# Altium PCB Tigershark 3D R1.8.PcbDoc (part 1 of 4)
Units mil, origin at the board's own origin, x right, y up, seen from the top; angles counter-clockwise.
Board outline 5500 x 4600 mil, 4 copper layers (Top Layer, Groun Plane, Power Plane, Bottom Layer), stack 61.73 mil thick; 307 components, 237 nets, 994 pads, 1215 vias.
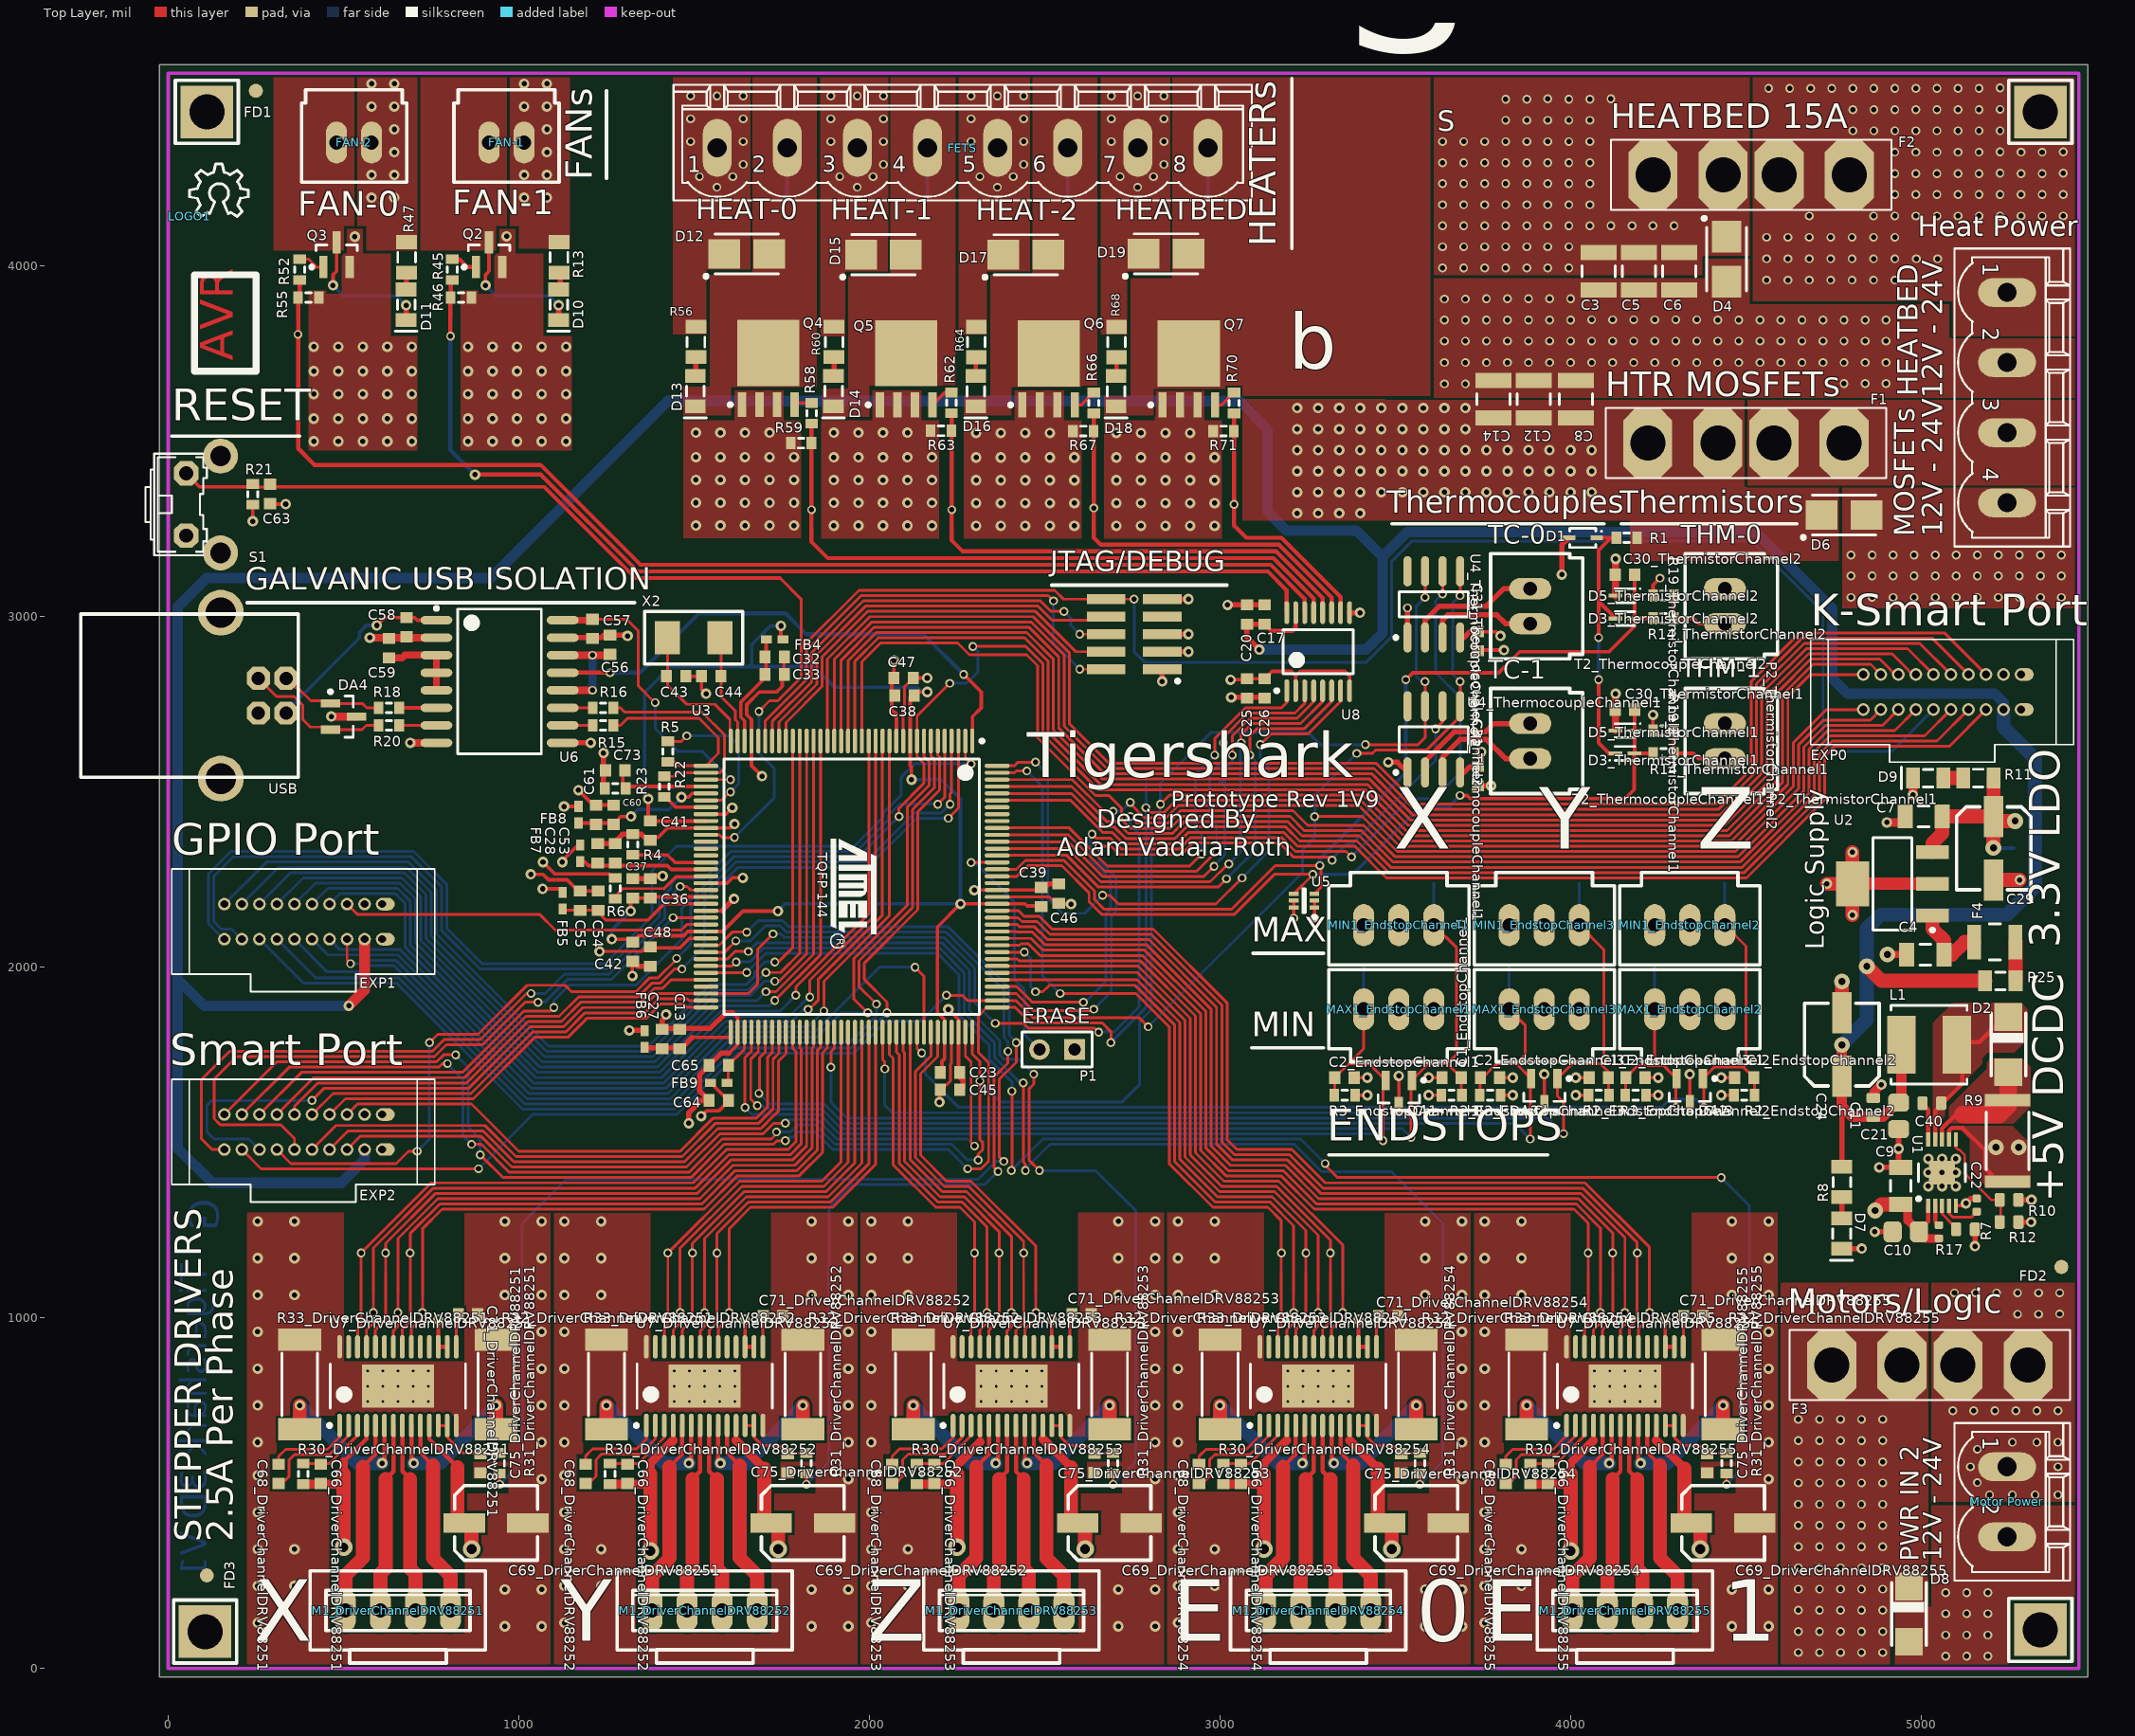
[diagram p0: Top Layer view]
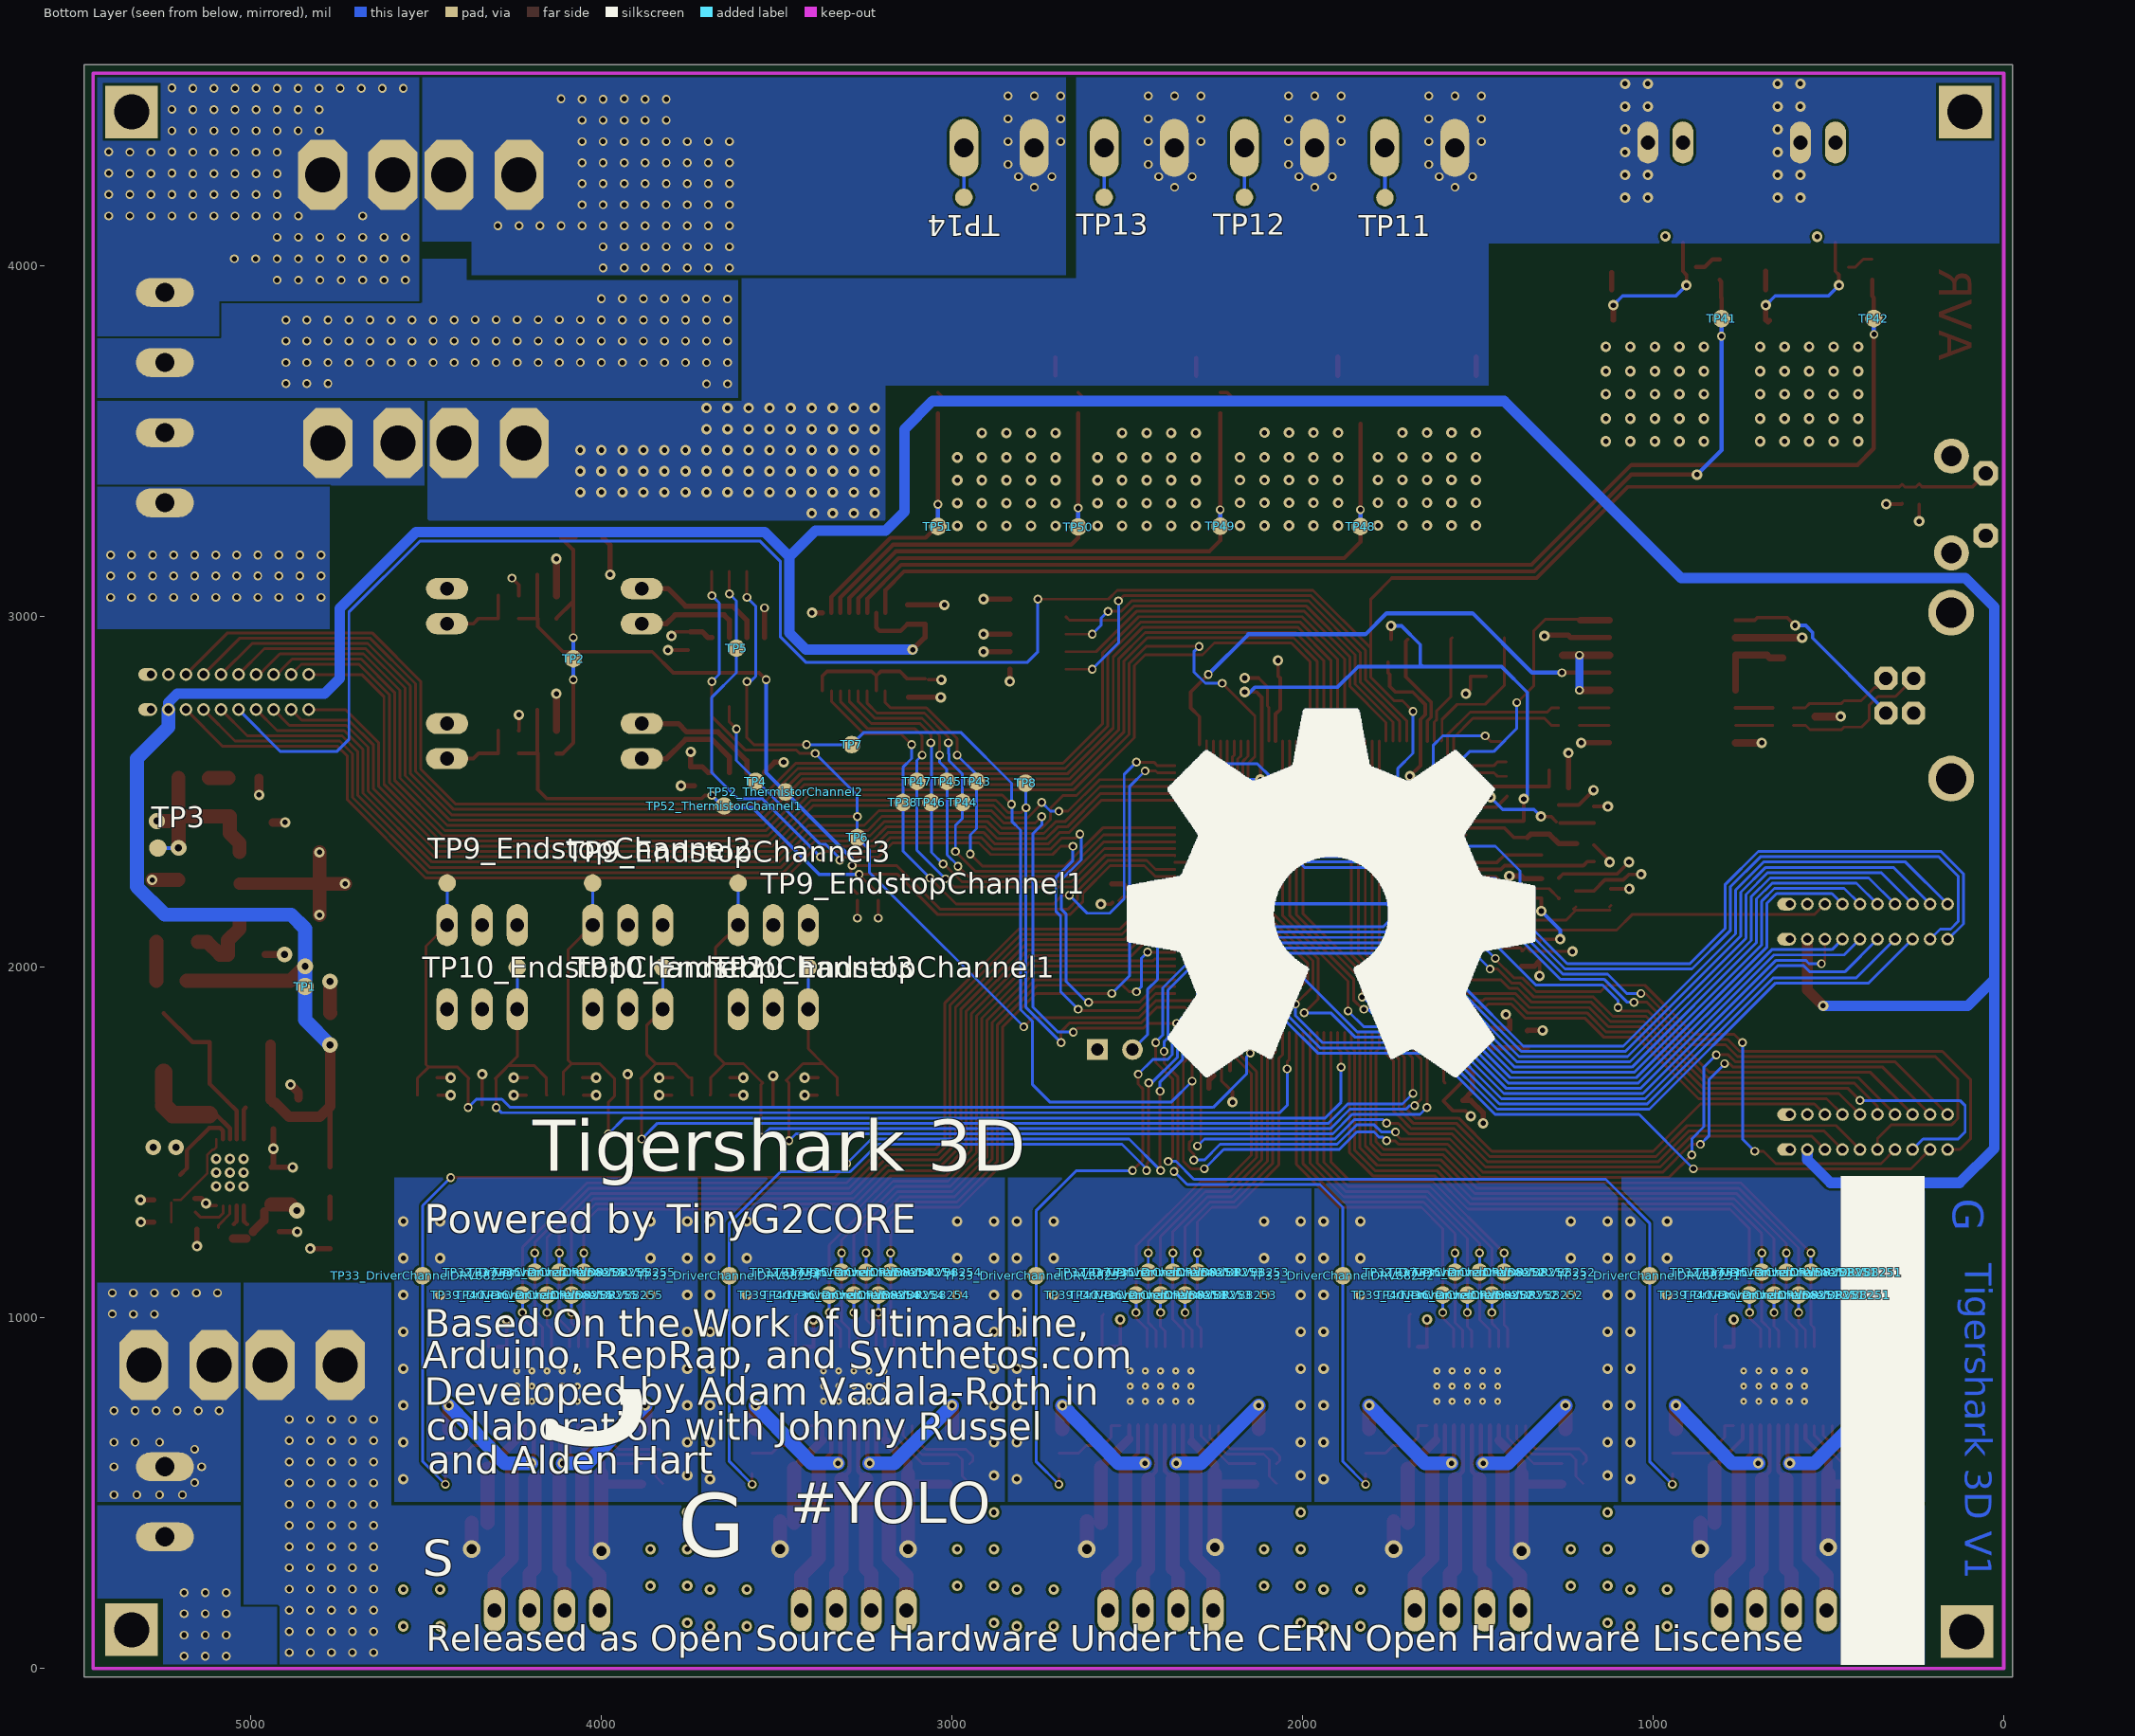
[diagram p1: Bottom Layer view, seen from below]
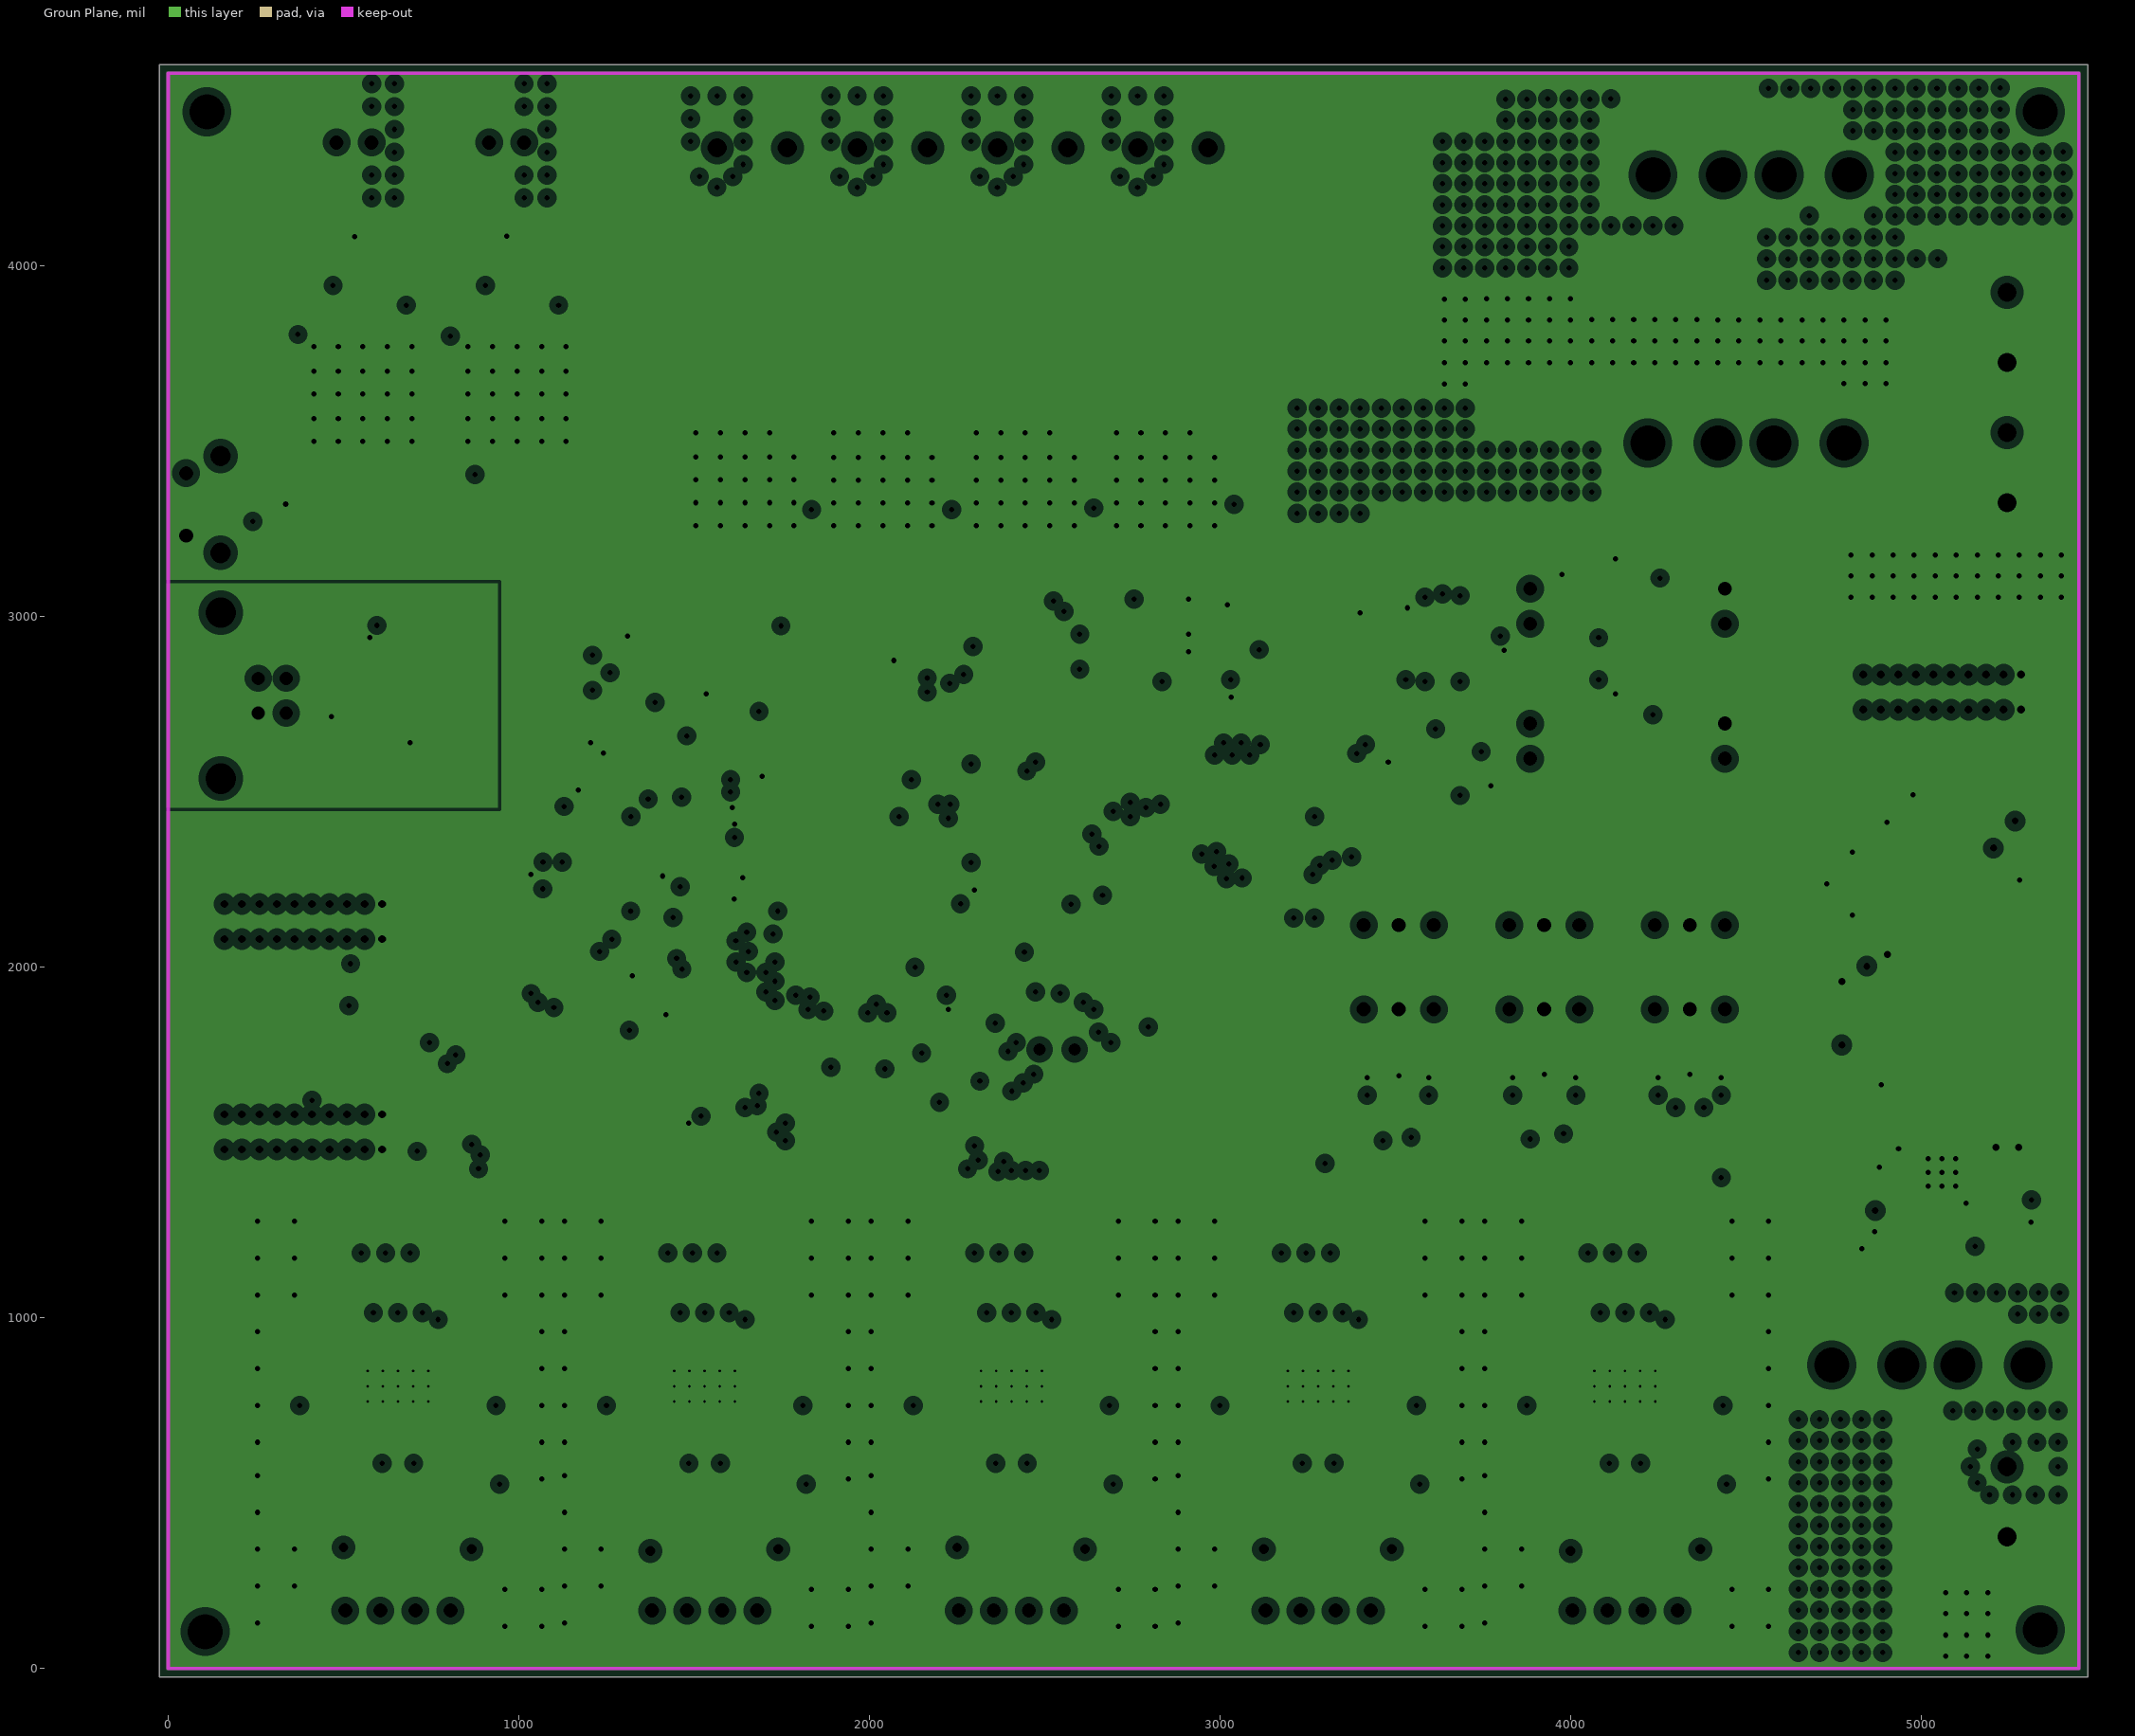
[diagram p2: Groun Plane, clearances drawn from the general rule]
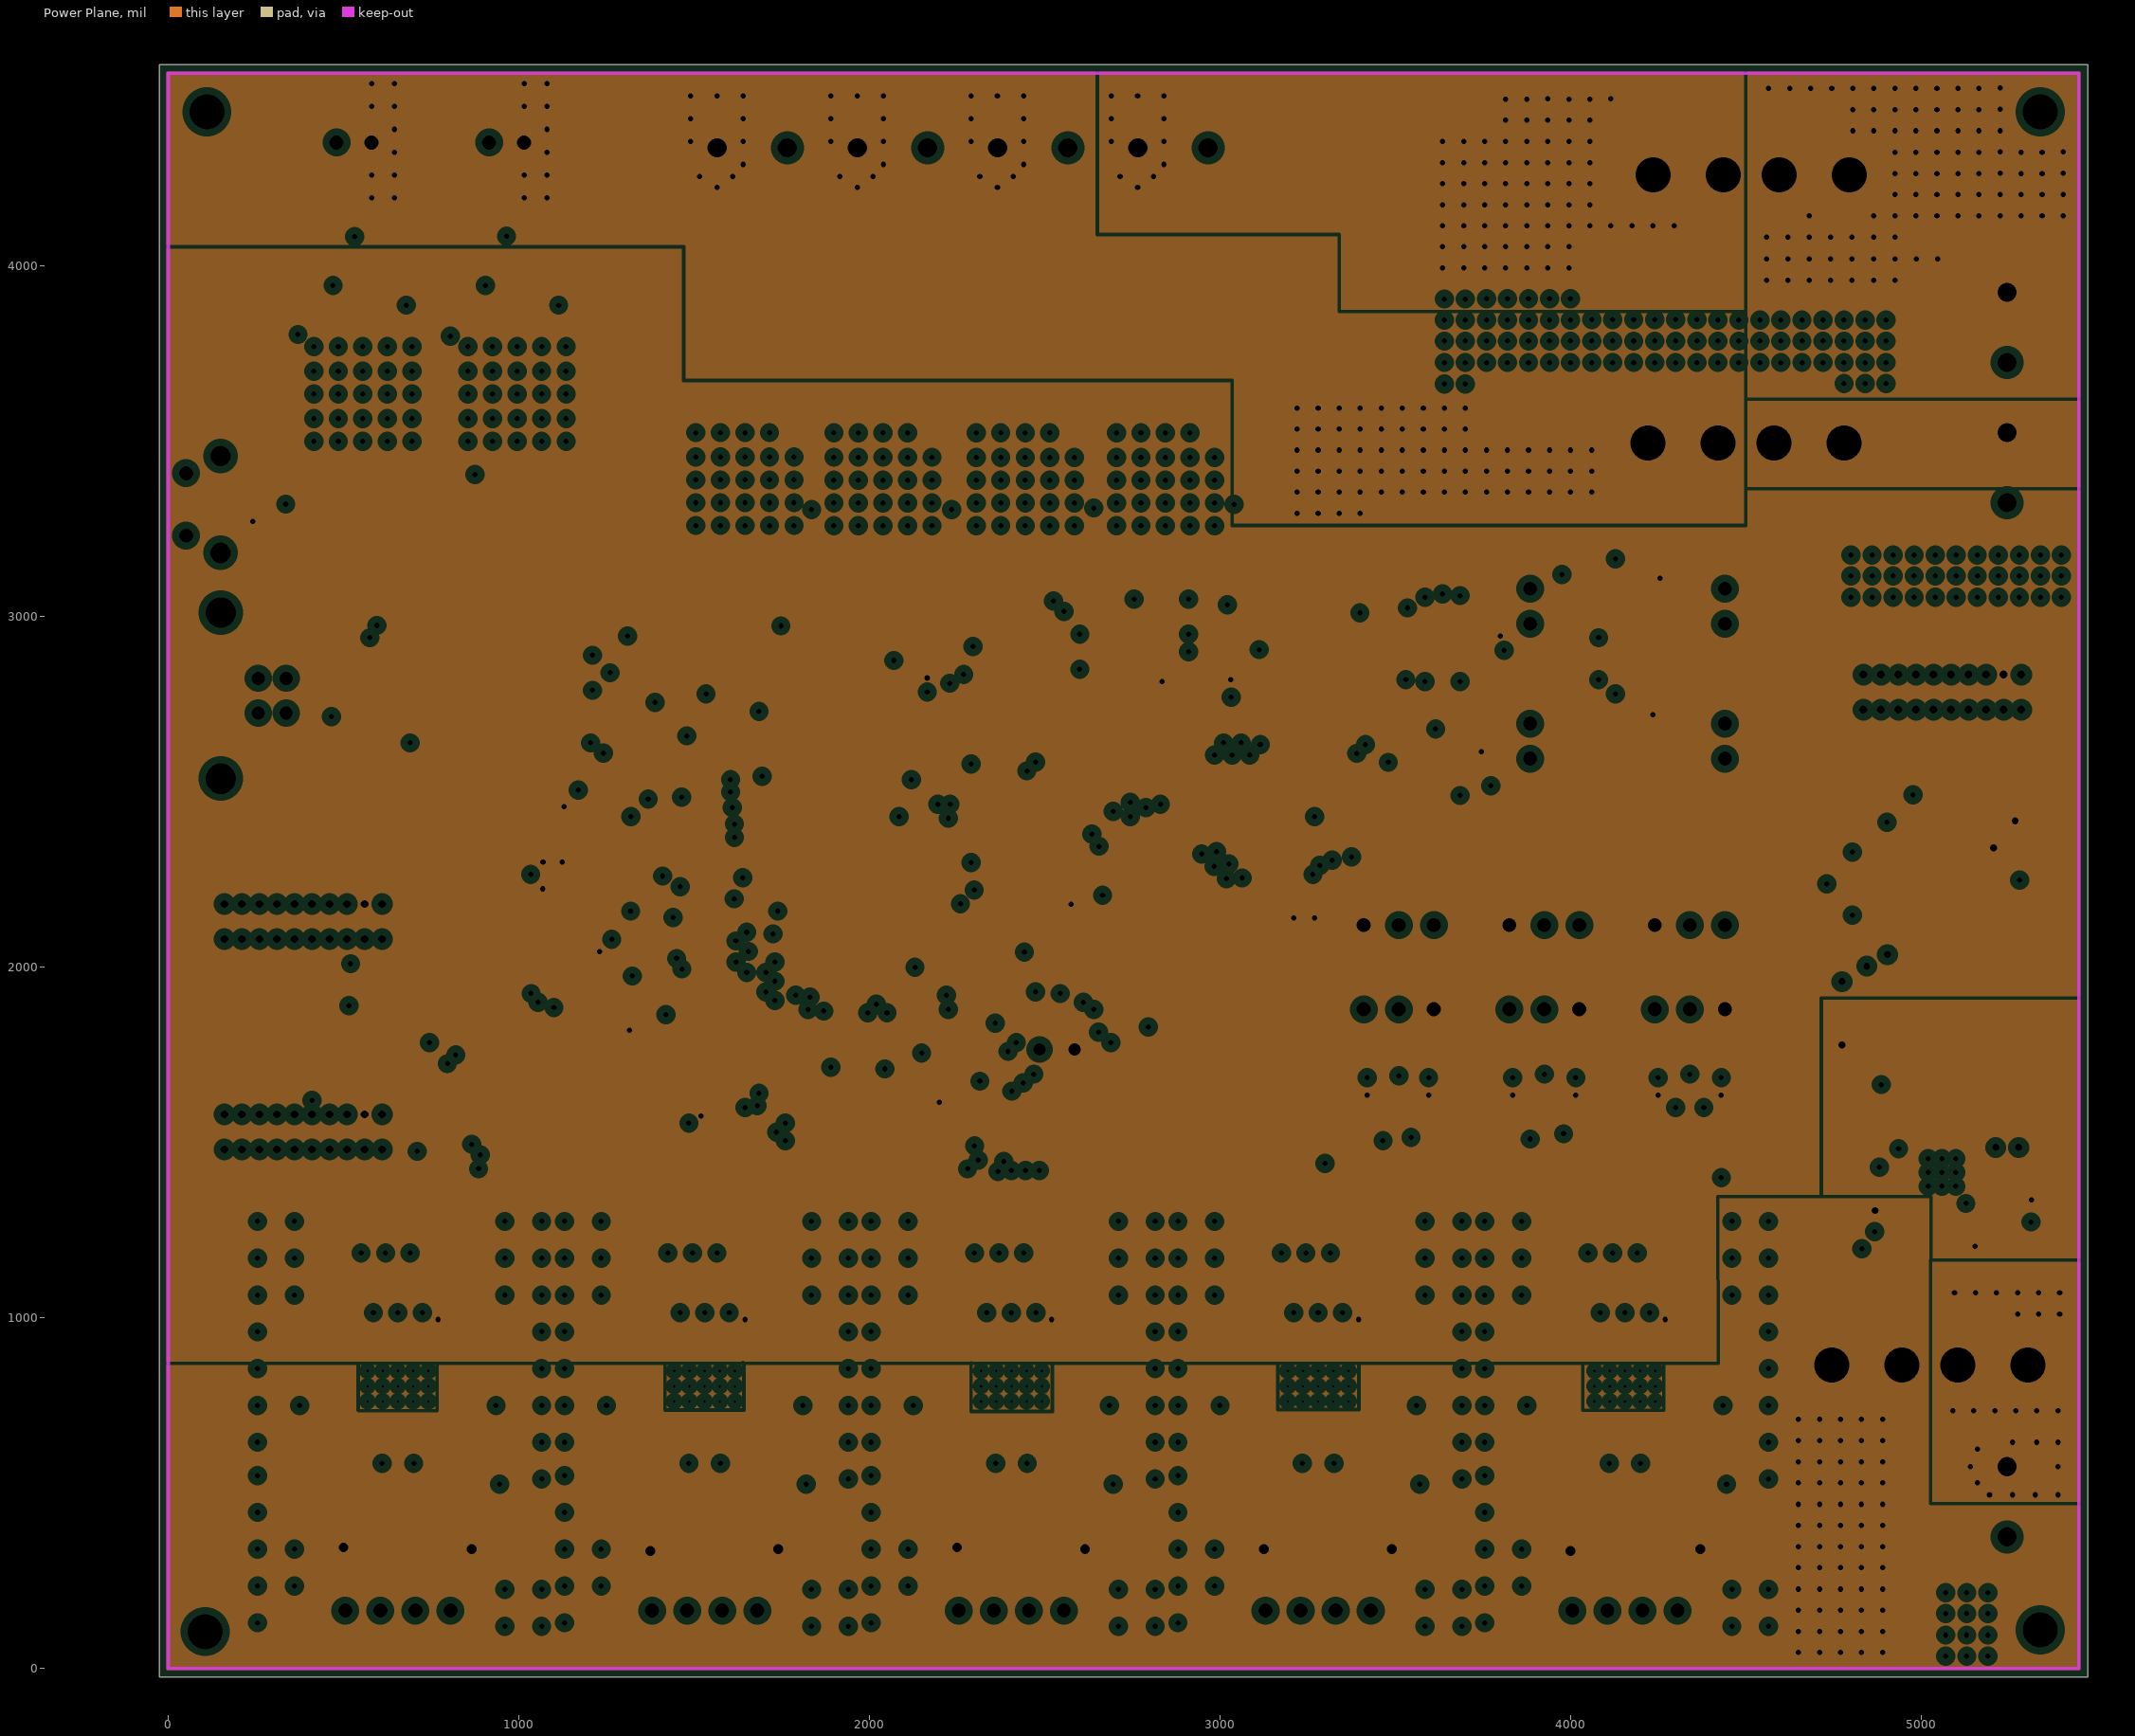
[diagram p3: Power Plane, clearances drawn from the general rule]

## Layer stack, top to bottom
Top Solder: solder mask 0.4, Solder Resist, Dk 3.5
Top Layer: signal copper 2.75
Dielectric1: prepreg 21.654, FR-4, Dk 4.2
Groun Plane: plane copper 1.4, net (Multiple Nets)
Dielectric2: core 10.236, FR-4, Dk 4.2
Power Plane: plane copper 1.4, net 3.3VCC
Dielectric3: prepreg 21.54, FR-4, Dk 4.2
Bottom Layer: signal copper 2.75
Bottom Solder: solder mask 0.4, Solder Resist, Dk 3.5

## Board outline
-25,-25 -25,4575 5475,4575 5475,-25

## Design rules (kind name [scope] priority, off if disabled: settings)
Clearance [All] p1: gap=7
ComponentClearance [All] p1: gap=0 collisioncheckmode=3 verticalgap=10 showdistances=FALSE
DiffPairsRouting [All] p1: maxlimit=10 minlimit=10 mostfreqgap=10 toplayer_minwidth=15 toplayer_maxwidth=15 toplayer_prefwidth=15 bottomlayer_minwidth=15 bottomlayer_maxwidth=15 bottomlayer_prefwidth=15 maxuncoupledlength=500
FanoutControl Fanout_SOIC [(InComponent('U8') AND InComponent('U7'))] p3: bgadir=Out bgaviamode=Centered fanoutstyle=Staggered fanoutdirection=Alternating viagrid=1 // Fanout_SOIC (Default Rule)
FanoutControl Fanout_Small [All] p4: bgadir=Out bgaviamode=Centered fanoutstyle=Auto fanoutdirection=Alternating viagrid=1 // Fanout_Small (Default Rule)
HoleSize [All] p1: absolutevalues=TRUE maxlimit=120 minlimit=1 maxpercent=80.000 minpercent=20.000
MinimumSolderMaskSliver [All] p1 off: minsoldermaskwidth=10
PlaneClearance [All] p1: clearance=20
PlaneConnect [All] p1: planeconnectstyle=Direct reliefexpansion=20 reliefentries=4 reliefconductorwidth=10 reliefairgap=10
PolygonConnect [All] p1: connectstyle=Direct reliefconductorwidth=45 reliefentries=4 polygonreliefangle="90 Angle" airgapwidth=10
RoomDefinition DriverChannelDRV88251 [InComponentClass('DriverChannelDRV88251')] p1: confinementstyle=ConfineIn formatcopy=TRUE lockcomponents=FALSE outline 225,0 1100,0 1100,1400 225,1400
RoomDefinition DriverChannelDRV88255 [InComponentClass('DriverChannelDRV88255')] p2: confinementstyle=ConfineIn formatcopy=TRUE lockcomponents=FALSE outline 3725,0 4600,0 4600,1400 3725,1400
RoomDefinition DriverChannelDRV88254 [InComponentClass('DriverChannelDRV88254')] p3: confinementstyle=ConfineIn formatcopy=TRUE lockcomponents=FALSE outline 2850,0 3725,0 3725,1400 2850,1400
RoomDefinition DriverChannelDRV88253 [InComponentClass('DriverChannelDRV88253')] p4: confinementstyle=ConfineIn formatcopy=TRUE lockcomponents=FALSE outline 1975,0 2850,0 2850,1400 1975,1400
RoomDefinition DriverChannelDRV88252 [InComponentClass('DriverChannelDRV88252')] p5: confinementstyle=ConfineIn formatcopy=TRUE lockcomponents=FALSE outline 1100,0 1975,0 1975,1400 1100,1400
RoutingVias [All] p1: holewidth=15 width=25 viastyle="Through Hole" minholewidth=15 minwidth=25 maxholewidth=28 maxwidth=50
SilkToSilkClearance [All] p1 off: silktosilkclearance=10
SilkToSolderMaskClearance SilkscreenOverComponentPads [IsPad] p1 off: minsilkscreentomaskgap=10 clearancetoexposedcopper=TRUE
SolderMaskExpansion [All] p1: expansion=4
UnpouredPolygon [All] p1: allowunpoured=FALSE
Width [All] p1: maxlimit=50 minlimit=7 preferedwidth=8
19 further rules are at their usual default settings.

## Classes and differential pairs
component class "U_MOSFETs and Driver": C17 C20 C25 C26 D10 D11 D12 D13 D14 D15 D16 D17 D18 D19 FAN-1 FAN-2 FETS Q2 Q3 Q4 Q5 Q6 Q7 R13 R45 R46 R47 R52 R55 R56 R58 R59 R60 R62 R63 R64 R66 R67 R68 R70 R71 TP11 TP12 TP13 TP14 TP38 TP41 TP42 TP43 TP44 TP45 TP46 TP47 TP48 TP49 TP50 TP51 U8
channel class "Thermocouple Channel": ThermocoupleChannel1 ThermocoupleChannel2
channel class "Endstop Channel": EndstopChannel1 EndstopChannel2 EndstopChannel3
channel class "Driver Channel DRV8825": DriverChannelDRV88251 DriverChannelDRV88252 DriverChannelDRV88253 DriverChannelDRV88254 DriverChannelDRV88255
component class ThermocoupleChannel2: C31_ThermocoupleChannel2 T2_ThermocoupleChannel2 U4_ThermocoupleChannel2
component class ThermocoupleChannel1: C31_ThermocoupleChannel1 T2_ThermocoupleChannel1 U4_ThermocoupleChannel1
component class EndstopChannel3: C1_EndstopChannel3 C2_EndstopChannel3 MAX1_EndstopChannel3 MIN1_EndstopChannel3 R2_EndstopChannel3 R3_EndstopChannel3 TP9_EndstopChannel3 TP10_EndstopChannel3
component class EndstopChannel2: C1_EndstopChannel2 C2_EndstopChannel2 MAX1_EndstopChannel2 MIN1_EndstopChannel2 R2_EndstopChannel2 R3_EndstopChannel2 TP9_EndstopChannel2 TP10_EndstopChannel2
component class EndstopChannel1: C1_EndstopChannel1 C2_EndstopChannel1 MAX1_EndstopChannel1 MIN1_EndstopChannel1 R2_EndstopChannel1 R3_EndstopChannel1 TP9_EndstopChannel1 TP10_EndstopChannel1
component class DriverChannelDRV88255: C66_DriverChannelDRV88255 C68_DriverChannelDRV88255 C69_DriverChannelDRV88255 C71_DriverChannelDRV88255 C75_DriverChannelDRV88255 M1_DriverChannelDRV88255 R30_DriverChannelDRV88255 R31_DriverChannelDRV88255 R32_DriverChannelDRV88255 R33_DriverChannelDRV88255 TP32_DriverChannelDRV88255 TP33_DriverChannelDRV88255 TP35_DriverChannelDRV88255 TP36_DriverChannelDRV88255 TP37_DriverChannelDRV88255 TP39_DriverChannelDRV88255 TP40_DriverChannelDRV88255 U7_DriverChannelDRV88255
component class DriverChannelDRV88254: C66_DriverChannelDRV88254 C68_DriverChannelDRV88254 C69_DriverChannelDRV88254 C71_DriverChannelDRV88254 C75_DriverChannelDRV88254 M1_DriverChannelDRV88254 R30_DriverChannelDRV88254 R31_DriverChannelDRV88254 R32_DriverChannelDRV88254 R33_DriverChannelDRV88254 TP32_DriverChannelDRV88254 TP33_DriverChannelDRV88254 TP35_DriverChannelDRV88254 TP36_DriverChannelDRV88254 TP37_DriverChannelDRV88254 TP39_DriverChannelDRV88254 TP40_DriverChannelDRV88254 U7_DriverChannelDRV88254
component class DriverChannelDRV88253: C66_DriverChannelDRV88253 C68_DriverChannelDRV88253 C69_DriverChannelDRV88253 C71_DriverChannelDRV88253 C75_DriverChannelDRV88253 M1_DriverChannelDRV88253 R30_DriverChannelDRV88253 R31_DriverChannelDRV88253 R32_DriverChannelDRV88253 R33_DriverChannelDRV88253 TP32_DriverChannelDRV88253 TP33_DriverChannelDRV88253 TP35_DriverChannelDRV88253 TP36_DriverChannelDRV88253 TP37_DriverChannelDRV88253 TP39_DriverChannelDRV88253 TP40_DriverChannelDRV88253 U7_DriverChannelDRV88253
component class DriverChannelDRV88252: C66_DriverChannelDRV88252 C68_DriverChannelDRV88252 C69_DriverChannelDRV88252 C71_DriverChannelDRV88252 C75_DriverChannelDRV88252 M1_DriverChannelDRV88252 R30_DriverChannelDRV88252 R31_DriverChannelDRV88252 R32_DriverChannelDRV88252 R33_DriverChannelDRV88252 TP32_DriverChannelDRV88252 TP33_DriverChannelDRV88252 TP35_DriverChannelDRV88252 TP36_DriverChannelDRV88252 TP37_DriverChannelDRV88252 TP39_DriverChannelDRV88252 TP40_DriverChannelDRV88252 U7_DriverChannelDRV88252
component class DriverChannelDRV88251: C66_DriverChannelDRV88251 C68_DriverChannelDRV88251 C69_DriverChannelDRV88251 C71_DriverChannelDRV88251 C75_DriverChannelDRV88251 M1_DriverChannelDRV88251 R30_DriverChannelDRV88251 R31_DriverChannelDRV88251 R32_DriverChannelDRV88251 R33_DriverChannelDRV88251 TP32_DriverChannelDRV88251 TP33_DriverChannelDRV88251 TP35_DriverChannelDRV88251 TP36_DriverChannelDRV88251 TP37_DriverChannelDRV88251 TP39_DriverChannelDRV88251 TP40_DriverChannelDRV88251 U7_DriverChannelDRV88251
component class "ATSAM3X8E Main Controller": C13 C23 C27 C28 C32 C33 C36 C37 C38 C39 C41 C42 C43 C44 C45 C46 C47 C48 C53 C54 C55 C56 C57 C58 C59 C60 C61 C63 C64 C65 C73 DA1 DA2 DA3 DA4 EXP0 EXP1 EXP2 FB4 FB5 FB6 FB7 FB8 FB9 FD1 FD2 FD3 JTAG/DEBUG microSD P1 R4 R5 R6 R15 R16 R18 R20 R21 R22 R23 S1 TP4 TP5 TP6 TP7 TP8 U3 U5 U6 USB X2
component class Designator: C3 C4 C5 C6 C7 C8 C9 C10 C11 C12 C14 C21 C22 C24 C29 C40 D1 D2 D4 D6 D7 D8 D9 F1 F2 F3 F4 "Heat Power" L1 "Motor Power" R1 R7 R8 R9 R10 R11 R12 R17 R25 TP1 TP2 TP3 U1 U2
net class MAX_ES_BUS[1..3]: MAX_ES0
net class MIN_ES_BUS[1..3]: MIN_ES0
net class MISO[1..2]: MISO0 MISO1 MISO2
net class SCLK[1..2]: SCLK0 SCLK1 SCLK2
net class TC_CS_BUS[1..2]: TC_CS0
net class THERM_AN_BUS[1..2]: THERM_AN0
component class ThermistorChannel1: C30_ThermistorChannel1 D3_ThermistorChannel1 D5_ThermistorChannel1 P2_ThermistorChannel1 R14_ThermistorChannel1 R19_ThermistorChannel1 TP52_ThermistorChannel1
component class ThermistorChannel2: C30_ThermistorChannel2 D3_ThermistorChannel2 D5_ThermistorChannel2 P2_ThermistorChannel2 R14_ThermistorChannel2 R19_ThermistorChannel2 TP52_ThermistorChannel2
channel class "Thermistor Channel": ThermistorChannel1 ThermistorChannel2
differential pair UMCU: +UMCU_P -UMCU_N
differential pair UI: +UI_P -UI_N
differential pair UD: +UD_P -UD_N
differential pair R: +R_P -R_N

## Components (designator, comment, footprint, x,y, rotation, side; value= is the part's Value field where it differs from the comment)
C1_EndstopChannel1 "0603" 1608[0603] 3660.47,1685 r180 top (schematic designator C1)
C1_EndstopChannel2 "0603" 1608[0603] 4495.47,1685 r180 top (schematic designator C1)
C1_EndstopChannel3 "0603" 1608[0603] 4080.47,1685 r180 top (schematic designator C1)
C2_EndstopChannel1 "0603" 1608[0603] 3355,1685 r0 top (schematic designator C2)
C2_EndstopChannel2 "0603" 1608[0603] 4185,1685 r0 top (schematic designator C2)
C2_EndstopChannel3 "0603" 1608[0603] 3770,1685 r0 top (schematic designator C2)
C3 "1210" C1210 4080,3985 r90 top
C4 "1206" C1206 5012,2036 r0 top
C5 "1210" C1210 4195,3985 r90 top
C6 "1210" C1210 4310,3985 r90 top
C7 "1206" C1206 5007,2430 r0 top
C8 "1210" C1210 4015,3620 r270 top
C9 "4.7uF" C1206 4941.57,1376.31 r90 top
C10 "1uF" C0805 4956.57,1245.31 r180 top
C11 "100nF" C0603 4863.57,1600.31 r90 top
C12 "1210" C1210 3895,3620 r270 top
C13 "0603" 1608[0603] 1458.9,1795 r270 top
C14 "1210" C1210 3780,3620 r270 top
C17 "0603" 1608[0603] 3127,3006 r90 top
C20 "0603" 1608[0603] 3077,3006 r90 top
C21 "10uF" C0805 4935.57,1576.31 r270 top
C22 "1uF" C0402 5158.57,1321.31 r90 top
C23 "0603" 1608[0603] 2230,1700 r180 top
C24 "VS C" "Panasonic VS C" 4658.57,1899.31 r270 top
C25 "0603" 1608[0603] 3077,2795 r90 top
C26 "0603" 1608[0603] 3127,2795 r270 top
C27 "0603" 1608[0603] 1408.9,1795 r270 top
C28 "0603" 1608[0603] 1225,2325 r270 top
C29 "VS C" "Panasonic VS C" 5322,2219 r90 top
C30_ThermistorChannel1 "Cap Semi" 1608[0603] 4155,2735 r0 top (schematic designator C30)
C30_ThermistorChannel2 "Cap Semi" 1608[0603] 4155,3120 r0 top (schematic designator C30)
C31_ThermocoupleChannel1 "Cap Semi" 1608[0603] 3735,2545 r90 top (schematic designator C31)
C31_ThermocoupleChannel2 "Cap Semi" 1608[0603] 3735,2930 r90 top (schematic designator C31)
C32 "0603" 1608[0603] 1730,2885 r180 top
C33 "0603" 1608[0603] 1730,2835 r180 top
C36 "0603" 1608[0603] 1375,2225 r270 top
C37 "0603" 1608[0603] 1325,2225 r270 top
C38 "0603" 1608[0603] 2100,2775 r0 top
C39 "0603" 1608[0603] 2490,2200 r270 top
C40 "100nF" C0603 5030.57,1612.31 r0 top
C41 "0603" 1608[0603] 1375,2390 r90 top
C42 "0603" 1608[0603] 1325,2044.19 r90 top
C43 "0603" 1608[0603] 1448.9,2830 r180 top
C44 "0603" 1608[0603] 1548.9,2830 r0 top
C45 "0603" 1608[0603] 2230,1650 r180 top
C46 "0603" 1608[0603] 2540,2210 r270 top
C47 "0603" 1608[0603] 2097.44,2825 r0 top
C48 "0603" 1608[0603] 1375,2030 r90 top
C53 "0603" 1608[0603] 1275,2325 r270 top
C54 "0603" 1608[0603] 1226.22,2190 r270 top
C55 "0603" 1608[0603] 1175,2190 r270 top
C56 "0603" 1608[0603] 1260,2920 r270 top
C57 "0603" 1608[0603] 1210,2965 r90 top
C58 "0603" 1608[0603] 680,2970 r90 top
C59 "0603" 1608[0603] 630,2910 r270 top
C60 "0603" 1608[0603] 1270,2435 r270 top
C61 "0603" 1608[0603] 1220,2435 r270 top
C63 "Cap Semi" 1608[0603] 290,3350 r90 top
C64 "0603" 1608[0603] 1570,1620 r0 top
C65 "0603" 1608[0603] 1570,1720 r0 top
C66_DriverChannelDRV88251 "0603" 1608[0603] 435,555 r90 top (schematic designator C66)
C66_DriverChannelDRV88252 "0603" 1608[0603] 1310,555 r90 top (schematic designator C66)
C66_DriverChannelDRV88253 "0603" 1608[0603] 2185,555 r90 top (schematic designator C66)
C66_DriverChannelDRV88254 "0603" 1608[0603] 3060,555 r90 top (schematic designator C66)
C66_DriverChannelDRV88255 "0603" 1608[0603] 3935,555 r90 top (schematic designator C66)
C68_DriverChannelDRV88251 "0603" 1608[0603] 315,555 r270 top (schematic designator C68)
C68_DriverChannelDRV88252 "0603" 1608[0603] 1190,555 r270 top (schematic designator C68)
C68_DriverChannelDRV88253 "0603" 1608[0603] 2065,555 r270 top (schematic designator C68)
C68_DriverChannelDRV88254 "0603" 1608[0603] 2940,555 r270 top (schematic designator C68)
C68_DriverChannelDRV88255 "0603" 1608[0603] 3815,555 r270 top (schematic designator C68)
C69_DriverChannelDRV88251 "VS C" "Panasonic VS C" 1055,530 r180 top (schematic designator C69)
C69_DriverChannelDRV88252 "VS C" "Panasonic VS C" 1930,530 r180 top (schematic designator C69)
C69_DriverChannelDRV88253 "VS C" "Panasonic VS C" 2805,530 r180 top (schematic designator C69)
C69_DriverChannelDRV88254 "VS C" "Panasonic VS C" 3680,530 r180 top (schematic designator C69)
C69_DriverChannelDRV88255 "VS C" "Panasonic VS C" 4555,530 r180 top (schematic designator C69)
C71_DriverChannelDRV88251 "0603" 1608[0603] 855,1010 r180 top (schematic designator C71)
C71_DriverChannelDRV88252 "0603" 1608[0603] 1725,1005 r180 top (schematic designator C71)
C71_DriverChannelDRV88253 "0603" 1608[0603] 2605,1010 r180 top (schematic designator C71)
C71_DriverChannelDRV88254 "0603" 1608[0603] 3480,1005 r180 top (schematic designator C71)
C71_DriverChannelDRV88255 "0603" 1608[0603] 4350,1005 r180 top (schematic designator C71)
C73 "0603" 1608[0603] 1275,2561.22 r0 top
C75_DriverChannelDRV88251 "0603" 1608[0603] 890,585 r90 top locked (schematic designator C75)
C75_DriverChannelDRV88252 "0603" 1608[0603] 1767,585 r90 top (schematic designator C75)
C75_DriverChannelDRV88253 "0603" 1608[0603] 2642,586 r90 top (schematic designator C75)
C75_DriverChannelDRV88254 "0603" 1608[0603] 3517,585 r90 top (schematic designator C75)
C75_DriverChannelDRV88255 "0603" 1608[0603] 4390,585 r90 top locked (schematic designator C75)
D1 "SZMM3Z4V7T1G" SZMM3Z4V7T1G 4035,3225 r0 top
D2 "SK310A-TP" SMA-SM 5248.57,1779.31 r270 top
D3_ThermistorChannel1 "Diode 1N4148" 1N4148WT 4155,2610 r180 top (schematic designator D3)
D3_ThermistorChannel2 "Diode 1N4148" 1N4148WT 4155,2995 r180 top (schematic designator D3)
D4 "SK310A-TP" SK310A-TP 4445,4020 r90 top
D5_ThermistorChannel1 "Diode 1N4148" 1N4148WT 4155,2675 r0 top (schematic designator D5)
D5_ThermistorChannel2 "Diode 1N4148" 1N4148WT 4155,3060 r0 top (schematic designator D5)
D6 "SK310A-TP" SK310A-TP 4780,3290 r180 top
D7 "LED2" "SM 0805 polarized" 4729.57,1160.31 r90 top
D8 "SMAJ30A" SMA-SM 4965,155 r270 top
D9 "LED2" "SM 0805 polarized" 4940,2583 r0 top
D10 "LED1" "SM 0805 polarized" 1070,3810 r90 top
D11 "LED1" "SM 0805 polarized" 635,3810 r90 top
D12 "B240A-13-F" SK310A-TP 1650,4034.75 r180 top
D13 "LED1" "SM 0805 polarized" 1460,3563.64 r90 top
D14 "LED1" "SM 0805 polarized" 1854,3563.64 r90 top
D15 "B240A-13-F" SK310A-TP 2040,4032.75 r180 top
D16 "LED1" "SM 0805 polarized" 2260,3563.22 r90 top
D17 "B240A-13-F" SK310A-TP 2446,4032.32 r180 top
D18 "LED1" "SM 0805 polarized" 2660,3563.22 r90 top
D19 "B240A-13-F" SK310A-TP 2846,4034.96 r180 top
DA1 "PESDxL2BT" SOT95P230X110-3N 3510,1640 r270 top
DA2 "PESDxL2BT" SOT95P230X110-3N 4340,1645 r270 top
DA3 "PESDxL2BT" SOT95P230X110-3N 3925,1645 r270 top
DA4 "PESDxL2BT" SOT95P230X110-3N 500,2715 r0 top
EXP0 "10X2-0.1X0.05" 10X2-0.05X0.1w 5060,2785 r180 top
EXP1 "10X2-0.1X0.05" 10X2-0.05X0.1w 385,2130 r180 top
EXP2 "10X2-0.1X0.05" 10X2-0.05X0.1w 385,1530 r180 top
F1 "3522-2" "3522-2 - WAVE SOLDER" 4500,3495 r180 top
F2 "3522-2" "3522-2 - WAVE SOLDER" 4515,4260 r180 top
F3 "3522-2" "3522-2 - WAVE SOLDER" 5025,865 r180 top
F4 "LittleFuse F1210" F1210_M 5210,2072 r0 top
FAN-1 "Molex 70543-02" 70543-02 965,4352.58 r180 top
FAN-2 "Molex 70543-02" 70543-02 530,4352.58 r180 top
FB4 "BLM15HG601SN1D" BLM18PG121SN1D 1730,2935 r180 top
FB5 "BLM15HG601SN1D" BLM18PG121SN1D 1125,2190 r270 top
FB6 "BLM15HG601SN1D" BLM18PG121SN1D 1358.9,1795 r270 top
FB7 "BLM15HG601SN1D" BLM18PG121SN1D 1175,2325 r270 top
FB8 "BLM15HG601SN1D" BLM18PG121SN1D 1170,2435 r270 top
FB9 "BLM15HG601SN1D" BLM18PG121SN1D 1570,1670 r0 top
FD1 "FIDUCIAL" FIDUCIAL-1X2 250,4500 r0 top
FD2 "FIDUCIAL" FIDUCIAL-1X2 5400,1145 r0 top
FD3 "FIDUCIAL" FIDUCIAL-1X2 110,265 r0 top
FETS "con-phoenix-508 - 8" MSTBV4#1 2266,4337.32 r90 top
"Heat Power" "con-phoenix-508 - 4" MSTBV4#2 5245,3625 r270 top
JTAG/DEBUG "FTSH-105-XX-X-DV" FTSH-105-XX-X-DV 2755,2950 r270 top
L1 "XAL5050-153MEB" XAL50xx-153 5022.57,1779.31 r180 top
LOGO1 "OSHW_LOGO_8MILX0150-NT" OSHW_8X150_NOTEXT 60.79,4141.42 r0 top
M1_DriverChannelDRV88251 "Molex 0705430003" 4POL254 655,165 r0 top (schematic designator M1)
M1_DriverChannelDRV88252 "Molex 0705430003" 4POL254 1530,165 r0 top (schematic designator M1)
M1_DriverChannelDRV88253 "Molex 0705430003" 4POL254 2405,165 r0 top (schematic designator M1)
M1_DriverChannelDRV88254 "Molex 0705430003" 4POL254 3280,165 r0 top (schematic designator M1)
M1_DriverChannelDRV88255 "Molex 0705430003" 4POL254 4155,165 r0 top (schematic designator M1)
MAX1_EndstopChannel1 "Molex 70543-03" 70543-03 3510,1880 r0 top (schematic designator MAX1)
MAX1_EndstopChannel2 "Molex 70543-03" 70543-03 4340,1880 r0 top (schematic designator MAX1)
MAX1_EndstopChannel3 "Molex 70543-03" 70543-03 3925,1880 r0 top (schematic designator MAX1)
MIN1_EndstopChannel1 "Molex 70543-03" 70543-03 3510,2120 r180 top locked (schematic designator MIN1)
MIN1_EndstopChannel2 "Molex 70543-03" 70543-03 4340,2120 r180 top (schematic designator MIN1)
MIN1_EndstopChannel3 "Molex 70543-03" 70543-03 3925,2120 r180 top (schematic designator MIN1)
"Motor Power" "con-phoenix-508 - 2" "MSTBV2 - duplicate" 5245,275 r270 top
P1 "ERASE" HDR1X2 2585,1765 r180 top
P2_ThermistorChannel1 "Molex 70543-02" 70543-02 4440,2645 r90 top (schematic designator P2)
P2_ThermistorChannel2 "Molex 70543-02" 70543-02 4440,3030 r90 top (schematic designator P2)
Q2 "IRML6346TRPBF" IRLML6346 915,4032.58 r90 top
Q3 "IRML6346TRPBF" IRLML6346 480,4032.58 r90 top
Q4 "PSMN7R0-60YS" PSMN7R0-60YS 1711.5,3707.02 r90 top
Q5 "PSMN7R0-60YS" PSMN7R0-60YS 2105,3706.64 r90 top
Q6 "PSMN7R0-60YS" PSMN7R0-60YS 2511,3706.22 r90 top
Q7 "PSMN7R0-60YS" PSMN7R0-60YS 2911,3706.22 r90 top
R1 "Res3" J1-0603 4160,3225 r0 top
R2_EndstopChannel1 "0603" J1-0603 3660.47,1635 r0 top (schematic designator R2)
R2_EndstopChannel2 "0603" J1-0603 4495.47,1635 r0 top (schematic designator R2)
R2_EndstopChannel3 "0603" J1-0603 4080.47,1635 r0 top (schematic designator R2)
R3_EndstopChannel1 "0603" J1-0603 3355.47,1635 r180 top (schematic designator R3)
R3_EndstopChannel2 "0603" J1-0603 4185.47,1635 r180 top (schematic designator R3)
R3_EndstopChannel3 "0603" J1-0603 3770.47,1635 r180 top (schematic designator R3)
R4 "0603" J1-0603 1325,2350 r90 top
R5 "0603" J1-0603 1425,2615 r90 top
R6 "0603" J1-0603 1275,2225 r270 top
R7 "10K" R0603 5126.57,1252.31 r0 top
R8 "Res3" "SM 0805 - gap trimmed" 4773.57,1387.31 r90 top
R9 "0.6r" 2512R-0.55 5246.57,1504.31 r90 top
R10 "10K" R0603 5250.57,1336.31 r180 top
R11 "Res3" "SM 0805 - gap trimmed" 5163,2540 r0 top
R12 "10K" R0603 5250.57,1273.31 r0 top
R13 "0805" "SM 0805 - gap trimmed" 1115,4025 r270 top
R14_ThermistorChannel1 "Res3" J1-0603 4265,2610 r0 top (schematic designator R14)
R14_ThermistorChannel2 "Res3" J1-0603 4265,2995 r0 top (schematic designator R14)
R15 "0603" J1-0603 1240,2690 r180 top
R16 "0603" J1-0603 1240,2740 r180 top
R17 "200K" R0402 5050.57,1245.31 r270 top
R18 "0603" J1-0603 629.12,2740 r180 top
R19_ThermistorChannel1 "Res3" J1-0603 4265,2675 r180 top (schematic designator R19)
R19_ThermistorChannel2 "Res3" J1-0603 4265,3060 r180 top (schematic designator R19)
R20 "0603" J1-0603 629.12,2690 r180 top
R21 "Res3" J1-0603 241,3349 r270 top
R22 "0603" J1-0603 1415,2515 r270 top
R23 "0603" J1-0603 1275,2510 r0 top
R25 "Res3" "SM 0805 - gap trimmed" 5226,1961 r0 top
R30_DriverChannelDRV88251 "0603" J1-0603 385,555 r90 top (schematic designator R30)
R30_DriverChannelDRV88252 "0603" J1-0603 1260,555 r90 top (schematic designator R30)
R30_DriverChannelDRV88253 "0603" J1-0603 2135,555 r90 top (schematic designator R30)
R30_DriverChannelDRV88254 "0603" J1-0603 3010,555 r90 top (schematic designator R30)
R30_DriverChannelDRV88255 "0603" J1-0603 3885,555 r90 top (schematic designator R30)
R31_DriverChannelDRV88251 "0603" J1-0603 945,585 r270 top (schematic designator R31)
R31_DriverChannelDRV88252 "0603" J1-0603 1820,585 r270 top (schematic designator R31)
R31_DriverChannelDRV88253 "0603" J1-0603 2695,585 r270 top (schematic designator R31)
R31_DriverChannelDRV88254 "0603" J1-0603 3570,585 r270 top (schematic designator R31)
R31_DriverChannelDRV88255 "0603" J1-0603 4445,585 r270 top (schematic designator R31)
R32_DriverChannelDRV88251 "2512" Resistor2512 935,810 r270 top (schematic designator R32)
R32_DriverChannelDRV88252 "2512" Resistor2512 1810,810 r270 top (schematic designator R32)
R32_DriverChannelDRV88253 "2512" Resistor2512 2685,810 r270 top (schematic designator R32)
R32_DriverChannelDRV88254 "2512" Resistor2512 3560,810 r270 top (schematic designator R32)
R32_DriverChannelDRV88255 "2512" Resistor2512 4435,810 r270 top (schematic designator R32)
R33_DriverChannelDRV88251 "2512" Resistor2512 375,810 r270 top (schematic designator R33)
R33_DriverChannelDRV88252 "2512" Resistor2512 1250,810 r270 top (schematic designator R33)
R33_DriverChannelDRV88253 "2512" Resistor2512 2125,810 r270 top (schematic designator R33)
R33_DriverChannelDRV88254 "2512" Resistor2512 3000,810 r270 top (schematic designator R33)
R33_DriverChannelDRV88255 "2512" Resistor2512 3875,810 r270 top (schematic designator R33)
R45 "0603" J1-0603 810,3990 r90 top
R46 "0603" J1-0603 835,3910 r0 top
R47 "0805" "SM 0805 - gap trimmed" 680,4025 r270 top
R52 "0603" J1-0603 375,3990 r90 top
R55 "0603" J1-0603 400,3910 r0 top
R56 "0805" "SM 0805 - gap trimmed" 1505,3783.64 r90 top
R58 "0603" J1-0603 1835,3580 r90 top
R59 "0603" J1-0603 1805,3495 r180 top
R60 "0805" "SM 0805 - gap trimmed" 1899,3783.64 r90 top
R62 "0603" J1-0603 2234,3610 r90 top
R63 "0603" J1-0603 2204,3530 r180 top
R64 "0805" "SM 0805 - gap trimmed" 2305,3783.22 r90 top
R66 "0603" J1-0603 2640,3609.58 r90 top
R67 "0603" J1-0603 2610,3529.58 r180 top
R68 "0805" "SM 0805 - gap trimmed" 2705,3783.22 r90 top
R70 "0603" J1-0603 3040,3609.58 r90 top
R71 "0603" J1-0603 3010,3529.58 r180 top
S1 "1571610-2" B3F-31XX 100,3320 r270 top
T2_ThermocoupleChannel1 "Molex 70543-02" 70543-02 3885,2645 r90 top (schematic designator T2)
T2_ThermocoupleChannel2 "Molex 70543-02" 70543-02 3885,3030 r90 top (schematic designator T2)
TP1 "TP4" TP-2#1 4845,1945 r90 top
TP2 "TP4" TP-2#1 4080,2880 r90 top
TP3 "TP4" TP-2#2 5265,2340 r270 bottom
TP4 "TP4" TP-2#1 3560,2530 r90 top
TP5 "TP4" TP-2#1 3615,2910 r90 top
TP6 "TP4" TP-2#1 3270,2370 r90 top
TP7 "TP4" TP-2#1 3286,2635 r90 top
TP8 "TP4" TP-2#1 2790,2525 r90 top
TP9_EndstopChannel1 "TP4" TP-2#2 3610,2240 r270 bottom (schematic designator TP9)
TP9_EndstopChannel2 "TP4" TP-2#2 4440,2240 r270 bottom (schematic designator TP9)
TP9_EndstopChannel3 "TP4" TP-2#2 4025,2240 r270 bottom (schematic designator TP9)
TP10_EndstopChannel1 "TP4" TP-2#2 3410,2000 r270 bottom (schematic designator TP10)
TP10_EndstopChannel2 "TP4" TP-2#2 4240,2000 r270 bottom (schematic designator TP10)
TP10_EndstopChannel3 "TP4" TP-2#2 3825,2000 r270 bottom (schematic designator TP10)
TP11 "TP4" TP-2#2 1765,4195 r270 bottom
TP12 "TP4" TP-2#2 2166,4196 r90 bottom
TP13 "TP4" TP-2#2 2566,4196 r270 bottom
TP14 "TP4" TP-2#2 2966,4196 r270 bottom
TP32_DriverChannelDRV88251 "TP4" TP-2#1 690,1130 r90 top (schematic designator TP32)
TP32_DriverChannelDRV88252 "TP4" TP-2#1 1565,1130 r270 top (schematic designator TP32)
TP32_DriverChannelDRV88253 "TP4" TP-2#1 2440,1130 r270 top (schematic designator TP32)
TP32_DriverChannelDRV88254 "TP4" TP-2#1 3315,1130 r270 top (schematic designator TP32)
TP32_DriverChannelDRV88255 "TP4" TP-2#1 4190,1130 r270 top (schematic designator TP32)
TP33_DriverChannelDRV88251 "TP4" TP-2#1 1010,1120 r90 top (schematic designator TP33)
TP33_DriverChannelDRV88252 "TP4" TP-2#1 1885,1120 r270 top (schematic designator TP33)
TP33_DriverChannelDRV88253 "TP4" TP-2#1 2760,1120 r270 top (schematic designator TP33)
TP33_DriverChannelDRV88254 "TP4" TP-2#1 3635,1120 r270 top (schematic designator TP33)
TP33_DriverChannelDRV88255 "TP4" TP-2#1 4510,1120 r270 top (schematic designator TP33)
TP35_DriverChannelDRV88251 "TP4" TP-2#1 550,1130 r90 top (schematic designator TP35)
TP35_DriverChannelDRV88252 "TP4" TP-2#1 1425,1130 r90 top (schematic designator TP35)
TP35_DriverChannelDRV88253 "TP4" TP-2#1 2300,1130 r90 top (schematic designator TP35)
TP35_DriverChannelDRV88254 "TP4" TP-2#1 3175,1130 r90 top (schematic designator TP35)
TP35_DriverChannelDRV88255 "TP4" TP-2#1 4050,1130 r90 top (schematic designator TP35)
TP36_DriverChannelDRV88251 "TP4" TP-2#1 585,1065 r90 top (schematic designator TP36)
TP36_DriverChannelDRV88252 "TP4" TP-2#1 1460,1065 r90 top (schematic designator TP36)
TP36_DriverChannelDRV88253 "TP4" TP-2#1 2335,1065 r90 top (schematic designator TP36)
TP36_DriverChannelDRV88254 "TP4" TP-2#1 3210,1065 r90 top (schematic designator TP36)
TP36_DriverChannelDRV88255 "TP4" TP-2#1 4085,1065 r90 top (schematic designator TP36)
TP37_DriverChannelDRV88251 "TP4" TP-2#1 620,1130 r90 top (schematic designator TP37)
TP37_DriverChannelDRV88252 "TP4" TP-2#1 1495,1130 r90 top (schematic designator TP37)
TP37_DriverChannelDRV88253 "TP4" TP-2#1 2370,1130 r90 top (schematic designator TP37)
TP37_DriverChannelDRV88254 "TP4" TP-2#1 3245,1130 r90 top (schematic designator TP37)
TP37_DriverChannelDRV88255 "TP4" TP-2#1 4120,1130 r90 top (schematic designator TP37)
TP38 "TP4" TP-2#2 3140,2470 r270 bottom
TP39_DriverChannelDRV88251 "TP4" TP-2#1 725,1065 r90 top (schematic designator TP39)
TP39_DriverChannelDRV88252 "TP4" TP-2#1 1600,1065 r90 top (schematic designator TP39)
TP39_DriverChannelDRV88253 "TP4" TP-2#1 2475,1065 r90 top (schematic designator TP39)
TP39_DriverChannelDRV88254 "TP4" TP-2#1 3350,1065 r90 top (schematic designator TP39)
TP39_DriverChannelDRV88255 "TP4" TP-2#1 4225,1065 r90 top (schematic designator TP39)
TP40_DriverChannelDRV88251 "TP4" TP-2#1 655,1065 r90 top (schematic designator TP40)
TP40_DriverChannelDRV88252 "TP4" TP-2#1 1530,1065 r90 top (schematic designator TP40)
TP40_DriverChannelDRV88253 "TP4" TP-2#1 2405,1065 r90 top (schematic designator TP40)
TP40_DriverChannelDRV88254 "TP4" TP-2#1 3280,1065 r90 top (schematic designator TP40)
TP40_DriverChannelDRV88255 "TP4" TP-2#1 4155,1065 r90 top (schematic designator TP40)
TP41 "TP4" TP-2#2 805,3850 r0 bottom
TP42 "TP4" TP-2#1 370.47,3850.47 r180 top
TP43 "TP4" TP-2#2 2930,2530 r270 bottom
TP44 "TP4" TP-2#2 2970,2470 r270 bottom
TP45 "TP4" TP-2#2 3015,2530 r270 bottom
TP46 "TP4" TP-2#2 3060,2470 r270 bottom
TP47 "TP4" TP-2#2 3100,2530 r270 bottom
TP48 "TP4" TP-2#1 1835,3257 r90 top
TP49 "TP4" TP-2#1 2235,3258 r90 top
TP50 "TP4" TP-2#1 2640,3256 r90 top
TP51 "TP4" TP-2#1 3040,3257 r90 top
TP52_ThermistorChannel1 "TP4" TP-2#1 3650,2460 r90 top (schematic designator TP52)
TP52_ThermistorChannel2 "TP4" TP-2#1 3475,2500 r90 top (schematic designator TP52)
U1 "LM25011MY/NOPB" VSSOP10 5059.57,1414.31 r90 top
U2 "MIC5209-3.3YS" SOT230P700X190-4N 4918,2238 r180 top
U3 "ATML-ATSAM3X-LQFP-144" LQFP144_N 1948.9,2230 r270 top locked
U4_ThermocoupleChannel1 "MAX31855EASA+" MAXM-S8+4_N 3610,2650 r90 top (schematic designator U4)
U4_ThermocoupleChannel2 "MAX31855EASA+" MAXM-S8+4_N 3610,3035 r90 top (schematic designator U4)
U5 "PMEG2005AEV115" PMEG2005AEV115 3240,2190 r180 top
U6 "ADuM4160" ADuM4160 945,2815 r0 top
U7_DriverChannelDRV88251 "DRV8825" DRV8825 655,805 r90 top (schematic designator U7)
U7_DriverChannelDRV88252 "DRV8825" DRV8825 1530,805 r90 top (schematic designator U7)
U7_DriverChannelDRV88253 "DRV8825" DRV8825 2405,805 r90 top (schematic designator U7)
U7_DriverChannelDRV88254 "DRV8825" DRV8825 3280,805 r90 top (schematic designator U7)
U7_DriverChannelDRV88255 "DRV8825" DRV8825 4155,805 r90 top (schematic designator U7)
U8 "TXB0106 Level Shifter" TSOP65P640X120-16N 3280,2900 r90 top
USB "USB-B" PN61729 150,2775 r270 top
X2 "445C35A12M00000" 445C35A12M00000 1423.9,2940 r0 top

## Footprints (in the part's own frame and the unit in brackets; to place one, negate y for a bottom-side part, rotate by r counter-clockwise, add the part's x,y. Pads: shape width x height; smd on the part's side, far side on the other; paste and mask are expansions set on the pad)
1N4148WT [mm] "Molded Diode, 2-Leads, Body 1.20x0.80mm, IPC Medium Density"
  rect 1x0.3 smd: 1(-0.675,0) 2(0.675,0)
  silkscreen extent -0.7,-0.5 1.15,0.55, body extent -0.65,-0.45 0.65,0.45, height 0.7
4POL254 [mil]
  oval 60x120 hole 40: 1(-150,0) 2(-50,0) 3(50,0) 4(150,0)
  silkscreen extent -250,-150 250,113, body extent -250,-150 250,113, height 454
10X2-0.05X0.1w [mil]
  round 36 hole 22: 1(225,50) 2(175,50) 3(125,50) 4(75,50) 5(25,50) 6(-25,50) 7(-75,50) 8(-125,50) 9(-175,50) 12(-175,-50) 13(-125,-50) 14(-75,-50) 15(-25,-50) 16(25,-50) 17(75,-50) 18(125,-50) 19(175,-50) 20(225,-50)
  oval 54x36 hole 22 copper offset -9,0: 10(-225,50) 11(-225,-50)
  silkscreen extent -375,-150 375,200, body extent -375,-150 375,200, height 591
445C35A12M00000 [mm] "Crystal Oscillator"
  rect 1.8x2.4 smd: 1(0,0) 2(3.8,0)
  silkscreen extent -1.65,-1.91 5.46,1.91, body extent -1.27,-1.52 5.08,1.52, height 1
1608[0603] [mm] "Chip Capacitor, Body 1.6x0.8mm, IPC High Density"
  rect 0.8x0.9 smd: 1(-0.7,0) 2(0.7,0)
  body extent -0.87,-0.48 0.87,0.48, height 1.3
2512R-0.55 [mm] "2512 Resistor 6.35mm x 3.2mm x 0.55mm"
  rect 0.9x3.3 smd: 1(-2.95,0) 2(2.95,0)
  silkscreen extent -2.1,-1.55 2.1,1.55, body extent -3.22,-1.68 3.22,1.68, height 0.65
"3522-2 - WAVE SOLDER" [mil] "3522-2"
  oct 140x200 hole 100: 1(-280,0) 1(-80,0) 2(80,0) 2(280,0)
  silkscreen extent -400,-100 400,100, body extent -402,-103 402,103, height 709
70543-02 [mil]
  oval 60x120 hole 40: 1(-50,0) 2(50,0)
  silkscreen extent -150,-150 150,113, body extent -150,-150 150,113, height 450
70543-03 [mil]
  oval 60x120 hole 40: 1(-100,0) 2(0,0) 3(100,0)
  silkscreen extent -200,-150 200,113, body extent -200,-150 200,113, height 450
ADuM4160 [mm] "SOIC, 16-Leads, Body 10.30x7.50mm, Pitch 1.27mm, IPC Medium Density"
  oval 2.3x0.6 smd: 1(-4.575,4.445) 2(-4.575,3.175) 3(-4.575,1.905) 4(-4.575,0.635) 5(-4.575,-0.635) 6(-4.575,-1.905) 7(-4.575,-3.175) 8(-4.575,-4.445) 9(4.575,-4.445) 10(4.575,-3.175) 11(4.575,-1.905) 12(4.575,-0.635) 13(4.575,0.635) 14(4.575,1.905) 15(4.575,3.175) 16(4.575,4.445)
  silkscreen extent -4.7,-5.25 3.03,5.42, body extent -3.8,-5.25 3.8,5.25, height 2.65
B3F-31XX [mil]
  oct 70x70 hole 40: 1(-89,-49) 2(89,-49)
  round 100 hole 59: 3(-138,49) 4(138,49)
  silkscreen extent -145,-165 145,10, body extent -165,-200 165,109, height 303
BLM18PG121SN1D [mm] "Chip Inductor, 2-Leads, Body 1.0x0.5mm, IPC Medium Density"
  rect 0.8x0.6 smd: 1(-0.6,0) 2(0.6,0)
  body extent -0.52,-0.28 0.53,0.27, height 0.6
C0402 [mil]
  rrect40% 22x24 smd: 1(-18.7,0) 2(19,0)
  body extent -20,-10 20,10, height 20
C0603 [mm]
  rrect40% 0.74x1 smd: 1(-0.68,0) 2(0.68,0)
  body extent -0.8,-0.4 0.8,0.4, height 0.8
C0805 [mil]
  rrect50% 52x60 smd: 1(-37.4,0) 2(38,0)
  body extent -40,-30 40,30, height 35
C1206 [mm] "Chip Capacitor, Body 3.2x1.6mm, IPC High Density"
  rect 1.1x1.7 smd: 1(-1.35,0) 2(1.35,0)
  silkscreen extent -0.4,-0.75 0.4,0.75, body extent -1.7,-0.9 1.7,0.9, height 1.3
C1210 [mm] "Chip Capacitor, Body 3.2x2.5mm, IPC High Density"
  rect 1.1x2.6 smd: 1(-1.35,0) 2(1.35,0)
  silkscreen extent -0.4,-1.2 0.4,1.2, body extent -1.7,-1.35 1.7,1.35, height 1.3
DRV8825 [mm] "TSOP, 28-Leads, Body 9.70x4.40mm, Pitch 0.65mm, Thermal Pad 5.22.2x3.10.2mm, IPC Medium Density"
  oval 1.7x0.35 smd: 1(-2.85,4.225) 2(-2.85,3.575) 3(-2.85,2.925) 4(-2.85,2.275) 5(-2.85,1.625) 6(-2.85,0.975) 7(-2.85,0.325) 8(-2.85,-0.325) 9(-2.85,-0.975) 10(-2.85,-1.625) 11(-2.85,-2.275) 12(-2.85,-2.925) 13(-2.85,-3.575) 14(-2.85,-4.225) 15(2.85,-4.225) 16(2.85,-3.575) 17(2.85,-2.925) 18(2.85,-2.275) 19(2.85,-1.625) 20(2.85,-0.975) 21(2.85,-0.325) 22(2.85,0.325) 23(2.85,0.975) 24(2.85,1.625) 25(2.85,2.275) 26(2.85,2.925) 27(2.85,3.575) 28(2.85,4.225)
  rect 3.1x5.22 smd: 29(0,0)
  silkscreen extent -2.97,-4.9 1.6,5.07, body extent -2.25,-4.9 2.25,4.9, height 1.2
F1210_M [mm] "Bournes PTC Fuse"
  rect 1x2.5 smd: 1(-1.5,0) 2(1.5,0)
  silkscreen extent -0.4,-1.3 0.4,1.3, body extent -1.7,-1.35 1.7,1.4, height 0.85
FIDUCIAL-1X2 [mil]
  rrect100% 40x40 smd paste-3897.64 mask+20: 1(0,0)
  body extent -40,-40 40,40, height 1
FTSH-105-XX-X-DV [mm] "1.27mm pitch, 10 pin, terminal strip; vertical, SMT"
  rect 0.75x2.8 smd mask+0: 1(2.54,2.03) 2(2.54,-2.03) 3(1.27,2.03) 4(1.27,-2.03) 5(0,2.03) 6(0,-2.03) 7(-1.27,2.03) 8(-1.27,-2.03) 9(-2.54,2.03) 10(-2.54,-2.03)
  silkscreen extent 3.28,3.03 3.52,3.27
HDR1X2 [mm] "Connector; Header; 2 Position"
  rect 1.5x1.5 hole 0.9: 1(0,0)
  round 1.5 hole 0.9: 2(2.54,0)
  silkscreen extent -1.27,-1.27 3.81,1.27
IRLML6346 [mm] "SOT23, 3-Leads, Body 2.92x2.37mm, Pitch 0.95mm, IPC Medium Density"
  rect 1.6x0.6 smd: 1(-0.9,0.95) 2(-0.9,-0.95) 3(0.9,0)
  silkscreen extent -1.02,-1.5 0.7,1.92, body extent -0.7,-1.52 0.7,1.52, height 1.12
J1-0603 [mm] "Chip Resistor, Body 1.6x0.8mm, IPC High Density"
  rect 0.7x0.9 smd: 1(-0.75,0) 2(0.75,0)
  silkscreen extent -0.2,-0.35 0.2,0.35, body extent -0.85,-0.48 0.85,0.48, height 0.9
LQFP144_N [mm] "Thin QFP, 144-Leads, Body 20x20mm, Pitch 0.5mm, IPC Medium Density"
  oval 1.8x0.3 smd: 1(-10.55,8.75) 2(-10.55,8.25) 3(-10.55,7.75) 4(-10.55,7.25) 5(-10.55,6.75) 6(-10.55,6.25) 7(-10.55,5.75) 8(-10.55,5.25) 9(-10.55,4.75) 10(-10.55,4.25) 11(-10.55,3.75) 12(-10.55,3.25) 13(-10.55,2.75) 14(-10.55,2.25) 15(-10.55,1.75) 16(-10.55,1.25) 17(-10.55,0.75) 18(-10.55,0.25) 19(-10.55,-0.25) 20(-10.55,-0.75) 21(-10.55,-1.25) 22(-10.55,-1.75) 23(-10.55,-2.25) 24(-10.55,-2.75) 25(-10.55,-3.25) 26(-10.55,-3.75) 27(-10.55,-4.25) 28(-10.55,-4.75) 29(-10.55,-5.25) 30(-10.55,-5.75) 31(-10.55,-6.25) 32(-10.55,-6.75) 33(-10.55,-7.25) 34(-10.55,-7.75) 35(-10.55,-8.25) 36(-10.55,-8.75) 73(10.55,-8.75) 74(10.55,-8.25) 75(10.55,-7.75) 76(10.55,-7.25) 77(10.55,-6.75) 78(10.55,-6.25) 79(10.55,-5.75) 80(10.55,-5.25) 81(10.55,-4.75) 82(10.55,-4.25) 83(10.55,-3.75) 84(10.55,-3.25) 85(10.55,-2.75) 86(10.55,-2.25) 87(10.55,-1.75) 88(10.55,-1.25) 89(10.55,-0.75) 90(10.55,-0.25) 91(10.55,0.25) 92(10.55,0.75) 93(10.55,1.25) 94(10.55,1.75) 95(10.55,2.25) 96(10.55,2.75) 97(10.55,3.25) 98(10.55,3.75) 99(10.55,4.25) 100(10.55,4.75) 101(10.55,5.25) 102(10.55,5.75) 103(10.55,6.25) 104(10.55,6.75) 105(10.55,7.25) 106(10.55,7.75) 107(10.55,8.25) 108(10.55,8.75)
  oval 0.3x1.8 smd: 37(-8.75,-10.55) 38(-8.25,-10.55) 39(-7.75,-10.55) 40(-7.25,-10.55) 41(-6.75,-10.55) 42(-6.25,-10.55) 43(-5.75,-10.55) 44(-5.25,-10.55) 45(-4.75,-10.55) 46(-4.25,-10.55) 47(-3.75,-10.55) 48(-3.25,-10.55) 49(-2.75,-10.55) 50(-2.25,-10.55) 51(-1.75,-10.55) 52(-1.25,-10.55) 53(-0.75,-10.55) 54(-0.25,-10.55) 55(0.25,-10.55) 56(0.75,-10.55) 57(1.25,-10.55) 58(1.75,-10.55) 59(2.25,-10.55) 60(2.75,-10.55) 61(3.25,-10.55) 62(3.75,-10.55) 63(4.25,-10.55) 64(4.75,-10.55) 65(5.25,-10.55) 66(5.75,-10.55) 67(6.25,-10.55) 68(6.75,-10.55) 69(7.25,-10.55) 70(7.75,-10.55) 71(8.25,-10.55) 72(8.75,-10.55) 109(8.75,10.55) 110(8.25,10.55) 111(7.75,10.55) 112(7.25,10.55) 113(6.75,10.55) 114(6.25,10.55) 115(5.75,10.55) 116(5.25,10.55) 117(4.75,10.55) 118(4.25,10.55) 119(3.75,10.55) 120(3.25,10.55) 121(2.75,10.55) 122(2.25,10.55) 123(1.75,10.55) 124(1.25,10.55) 125(0.75,10.55) 126(0.25,10.55) 127(-0.25,10.55) 128(-0.75,10.55) 129(-1.25,10.55) 130(-1.75,10.55) 131(-2.25,10.55) 132(-2.75,10.55) 133(-3.25,10.55) 134(-3.75,10.55) 135(-4.25,10.55) 136(-4.75,10.55) 137(-5.25,10.55) 138(-5.75,10.55) 139(-6.25,10.55) 140(-6.75,10.55) 141(-7.25,10.55) 142(-7.75,10.55) 143(-8.25,10.55) 144(-8.75,10.55)
  silkscreen extent -10.67,-9.25 9.25,9.58, body extent -10,-10 10,10, height 1.6
MAXM-S8+4_N [mm] "SOIC, 8-Leads, Body 4.9x3.9mm, Pitch 1.27mm, IPC Medium Density"
  oval 2.2x0.6 smd: 1(-2.4,1.905) 2(-2.4,0.635) 3(-2.4,-0.635) 4(-2.4,-1.905) 5(2.4,-1.905) 6(2.4,-0.635) 7(2.4,0.635) 8(2.4,1.905)
  silkscreen extent -2.52,-2.5 0.9,2.88, body extent -2,-2.5 2,2.5, height 1.75
"MSTBV2 - duplicate" [mil]
  oval 82.5x165 hole 55: 1(-300,0) 2(-100,0)
  silkscreen extent -425,-150 25,180, body extent -425,-150 25,180, height 472
MSTBV4#1 [mil]
  oval 165x82.5 hole 55: 1(0,700) 2(0,500) 3(0,300) 4(0,100) 5(0,-100) 6(0,-300) 7(0,-500) 8(0,-700)
  silkscreen extent -150,-825 180,825, body extent -150,-825 180,825, height 472
MSTBV4#2 [mil]
  oval 82.5x165 hole 55: 1(-300,0) 2(-100,0) 3(100,0) 4(300,0)
  silkscreen extent -425,-150 425,180, body extent -428,-153 428,183, height 472
OSHW_8X150_NOTEXT [mil]
  silkscreen extent 0,0 167,150, body extent 0,2 168,148
"Panasonic VS C" [mm]
  rect 3x1.4 smd: 1(5.348,2.921) 2(0.748,2.921)
  silkscreen extent 0.05,0.22 6.05,5.62, body extent 0.1,0.29 6,5.59, height 5.41
PMEG2005AEV115 [mm] "SOT23, 6-Leads, Body 1.7x1.7mm (max), Pitch 0.50mm, IPC Medium Density"
  rect 0.7x0.3 smd: 1(-0.75,0.5) 2(-0.75,0) 3(-0.75,-0.5) 4(0.75,-0.5) 5(0.75,0) 6(0.75,0.5)
  silkscreen extent -0.88,-0.85 0.1,1.32, body extent -0.65,-0.85 0.65,0.85, height 0.6
PN61729 [mil]
  oct 66x66 hole 38: 1(50,186) 2(-49.21,186) 3(-49.21,107) 4(50,107)
  round 130.5 hole 87: P$1(-236.22,0) P$2(237,0)
  silkscreen extent -232,-400 233,221, body extent -237,-405 238,226, height 406
PSMN7R0-60YS [mm] "TO, 5-Pads, Body 5.15x5.86mm (max), IPC Medium Density"
  rect 1.8x0.6 smd: 1(-2.6,1.905) 2(-2.6,0.635) 3(-2.6,-0.635) 4(-2.6,-1.905)
  rect 4.8x4.5 smd: 5(1.14,0)
  silkscreen extent -2.72,2.63 -2.48,2.88, body extent -1.85,-2.5 2.25,2.5, height 1.2
R0402 [mil]
  rrect40% 22x24 smd: 1(-18.9,0) 2(19,0)
  body extent -20,-10 20,10, height 14
R0603 [mm]
  rrect40% 0.74x1 smd: 1(-0.68,0) 2(0.68,0)
  body extent -0.8,-0.4 0.8,0.4, height 0.8
Resistor2512 [mm]
  rect 1.6x3.1 smd: 1(-3.25,0) 2(3.25,0)
  silkscreen extent -2.26,-1.3 2.26,1.3, body extent -3.24,-1.4 3.24,1.4, height 0.9
SK310A-TP [mm] "Molded Diode, 2-Leads, Body 4.31x2.69mm, IPC Medium Density"
  rect 2.3x2.15 smd: 1(-1.625,0) 2(1.625,0)
  silkscreen extent -2.3,-1.45 3.07,1.75, body extent -2.29,-1.42 2.28,1.42, height 2.95
"SM 0805 - gap trimmed" [mm]
  rect 1x1.5 smd: 1(-1.1,0) 2(1.1,0)
  silkscreen extent -0.36,-0.64 0.35,0.63
"SM 0805 polarized" [mm]
  rect 1x1.5 smd: 1(0.93,-1.105) 2(3.13,-1.105)
  silkscreen extent 0.1,-1.9 2.38,-0.3
SMA-SM [mil]
  rect 79x79 smd: A(79,0) C(-78.74,0)
  silkscreen extent -89,-49 89,50, body extent -105,-54 105,55, height 116
SOT95P230X110-3N [mm] "SOT23, 3-Leads, Body 2.90x2.30mm, Pitch 0.95mm, IPC Medium Density"
  rect 1.4x0.6 smd: 1(-0.95,0.95) 2(-0.95,-0.95) 3(0.95,0)
  silkscreen extent -1.07,-1.5 0.7,1.93, body extent -0.7,-1.5 0.7,1.5, height 1.1
SOT230P700X190-4N [mm] "SOT223, 4-Leads, Body 6.50x7.00mm (avg), Pitch 2.30mm, IPC Medium Density"
  rect 2.4x1 smd: 1(-2.9,2.3) 2(-2.9,0) 3(-2.9,-2.3)
  rect 2.4x3.25 smd: 4(2.9,0)
  silkscreen extent -3.03,-3.35 1.4,3.47, body extent -1.85,-3.35 1.85,3.35, height 1.9
SZMM3Z4V7T1G [mm] "Molded Diode, 2-Leads, Body 1.70x1.25mm, IPC Medium Density"
  rect 0.9x0.35 smd: 1(-1,0) 2(1,0)
  silkscreen extent -0.95,-0.7 1.4,0.7, body extent -0.9,-0.67 0.9,0.67, height 1
TP-2#1 [mil]
  round 50 smd far side: 1(0,0)
TP-2#2 [mil]
  round 50 smd: 1(0,0)
TSOP65P640X120-16N [mm] "TSOP, 16-Leads, Body 5.00x4.40mm, Pitch 0.65mm, IPC Medium Density"
  oval 1.65x0.35 smd: 1(-2.825,2.275) 2(-2.825,1.625) 3(-2.825,0.975) 4(-2.825,0.325) 5(-2.825,-0.325) 6(-2.825,-0.975) 7(-2.825,-1.625) 8(-2.825,-2.275) 9(2.825,-2.275) 10(2.825,-1.625) 11(2.825,-0.975) 12(2.825,-0.325) 13(2.825,0.325) 14(2.825,0.975) 15(2.825,1.625) 16(2.825,2.275)
  silkscreen extent -2.95,-2.55 1.6,3.12, body extent -2.25,-2.55 2.25,2.55, height 1.2
VSSOP10 [mm] "TSSOP, 10-Leads, Body 3.15x3.00mm, Pitch 0.50mm, Thermal Pad 2.05.2x1.50.2mm, IPC High Density"
  rect 1.02x0.3 smd mask+0.102: 1(-2.4,1) 2(-2.4,0.5) 3(-2.4,0) 4(-2.4,-0.5) 5(-2.4,-1) 6(2.4,-1) 7(2.4,-0.5) 8(2.4,0) 9(2.4,0.5) 10(2.4,1)
  rect 1.73x1.9 smd: 11(0,0)
  silkscreen extent -2.02,-1.7 0.65,1.82, body extent -1.55,-1.7 1.55,1.7, height 1.09
XAL50xx-153 [mm] "Precision Wire Wound Inductor, 2-Leads, Body 5.28x5.48mm, IPC High Density"
  rect 2.05x4.2 smd: 1(-2,0) 2(2,0)
  silkscreen extent -2.75,-2.85 2.75,2.85, body extent -2.74,-2.84 2.74,2.84, height 4.25